# EAGLE board SparkFun_Qwiic_Presence_STHS34PF80-Panel (EAGLE 9.6.2), part 1 of 3
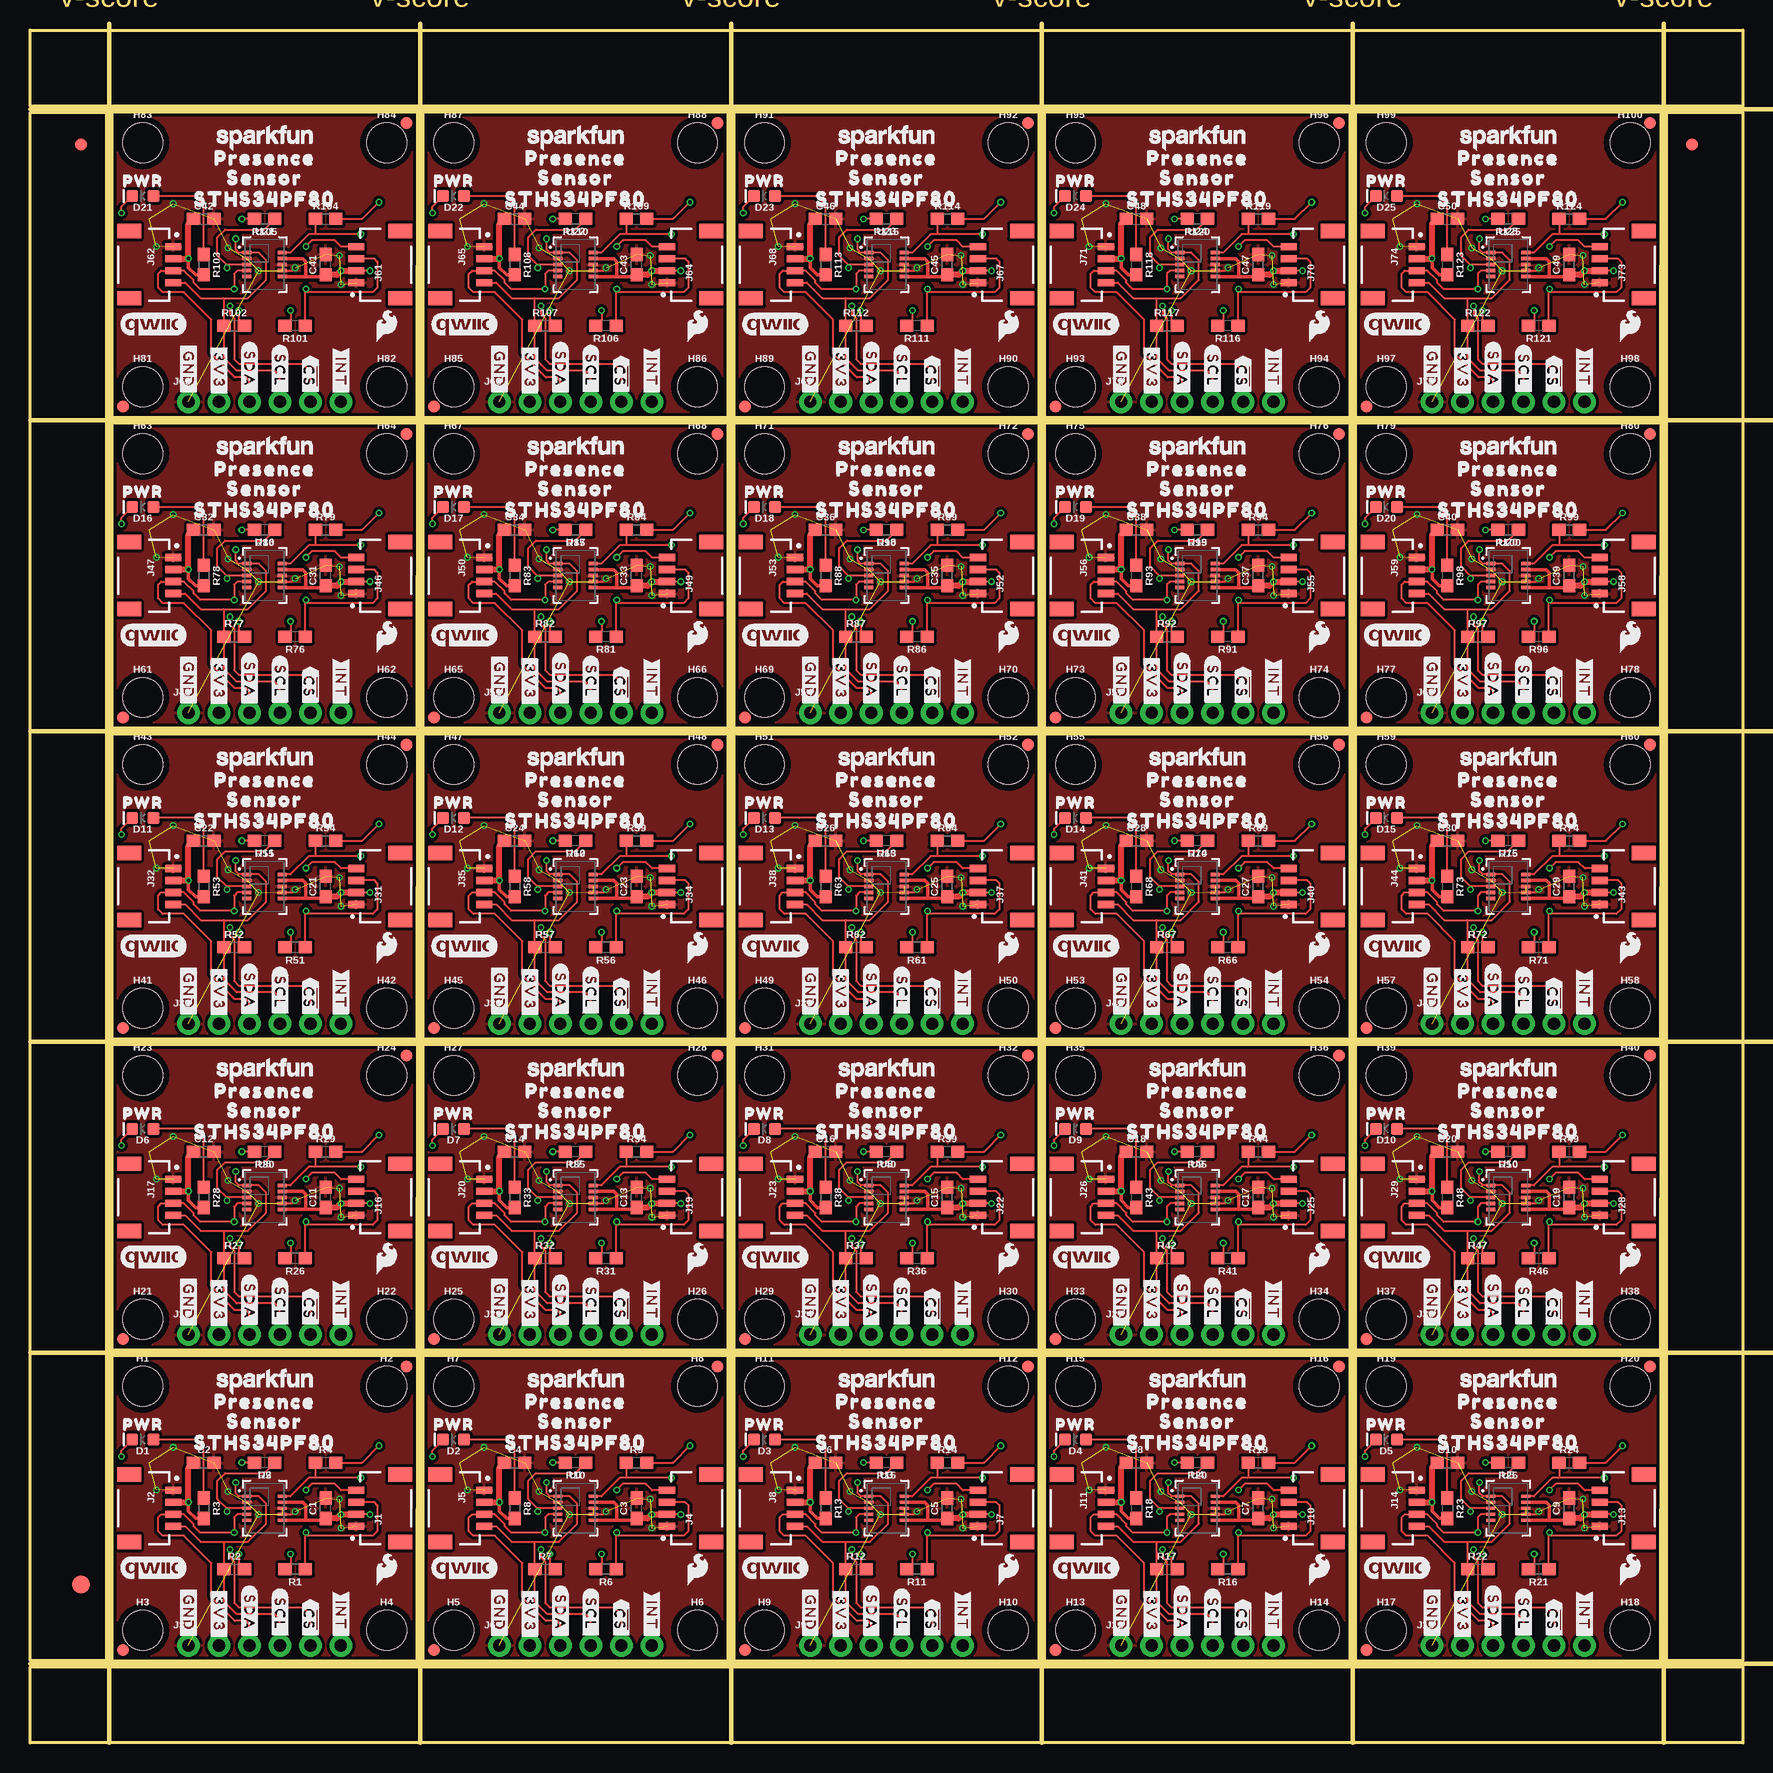
[diagram p0: board, top side]
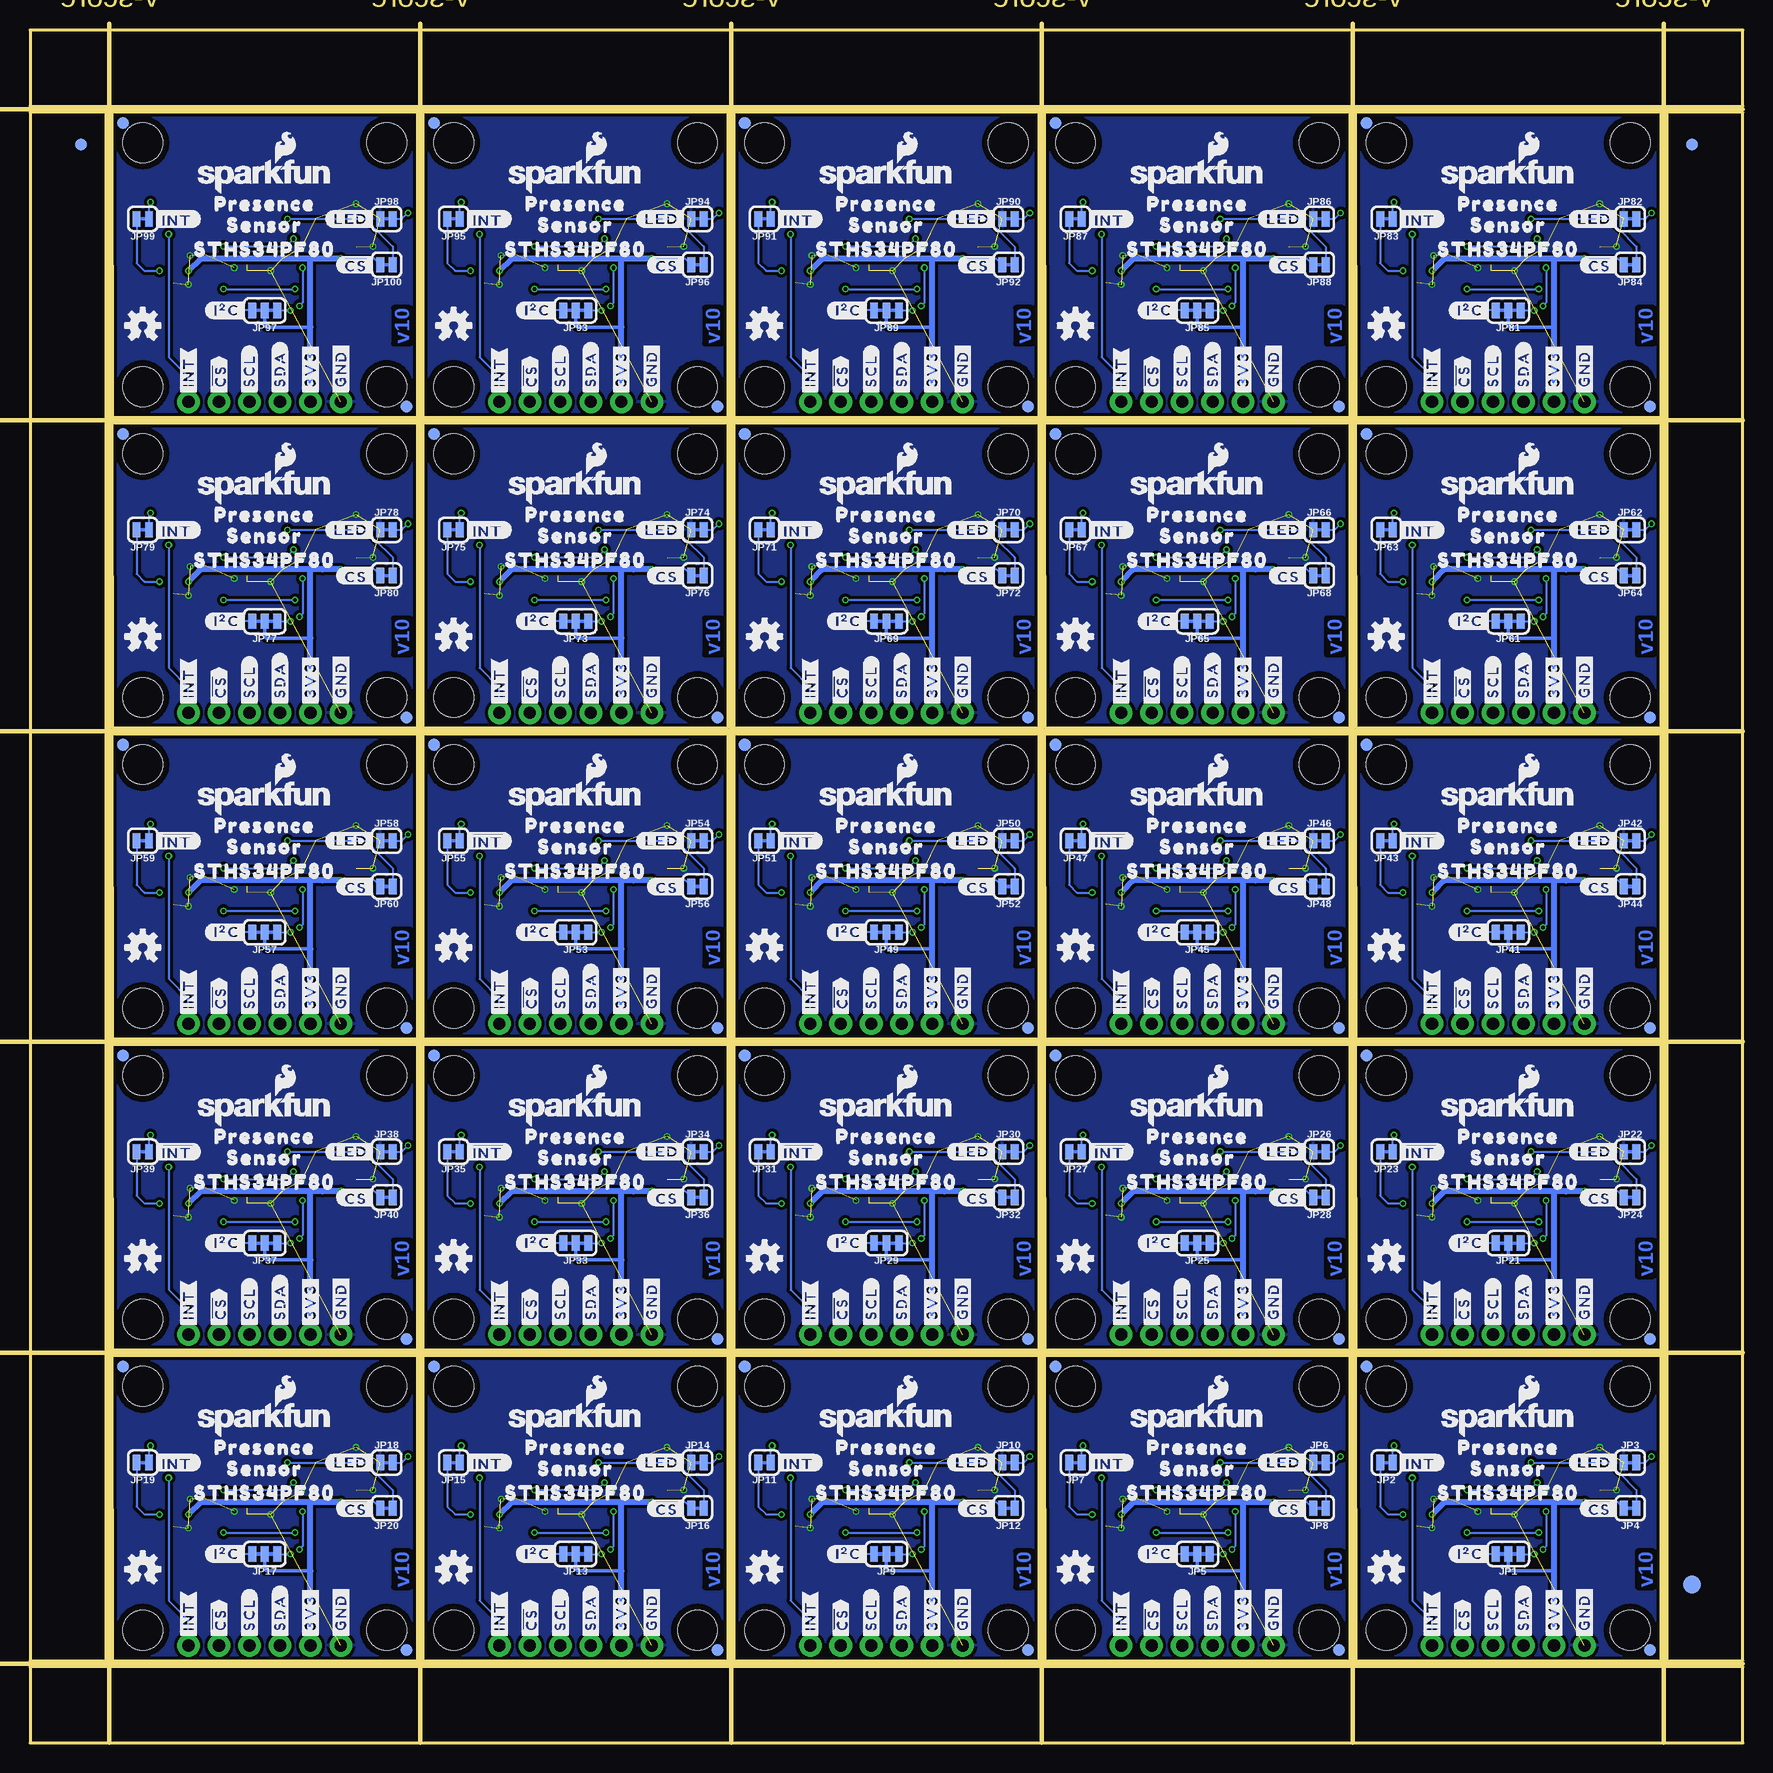
[diagram p1: board, bottom side, seen from below]

Size 142.75 x 142.75 mm. Coordinates in mm from the lower left corner, seen from the top.
Outline: 6.86,6.86 32.24,6.86 32.26,32.26 6.86,32.26 6.86,6.86
Outline: 32.77,6.86 58.15,6.86 58.17,32.26 32.77,32.26 32.77,6.86
Outline: 58.67,6.86 84.05,6.86 84.07,32.26 58.67,32.26 58.67,6.86
Outline: 84.58,6.86 109.96,6.86 109.98,32.26 84.58,32.26 84.58,6.86
Outline: 110.49,6.86 135.87,6.86 135.89,32.26 110.49,32.26 110.49,6.86
Outline: 6.86,32.77 32.24,32.77 32.26,58.17 6.86,58.17 6.86,32.77
Outline: 32.77,32.77 58.15,32.77 58.17,58.17 32.77,58.17 32.77,32.77
Outline: 58.67,32.77 84.05,32.77 84.07,58.17 58.67,58.17 58.67,32.77
Outline: 84.58,32.77 109.96,32.77 109.98,58.17 84.58,58.17 84.58,32.77
Outline: 110.49,32.77 135.87,32.77 135.89,58.17 110.49,58.17 110.49,32.77
Outline: 6.86,58.67 32.24,58.67 32.26,84.07 6.86,84.07 6.86,58.67
Outline: 32.77,58.67 58.15,58.67 58.17,84.07 32.77,84.07 32.77,58.67
Outline: 58.67,58.67 84.05,58.67 84.07,84.07 58.67,84.07 58.67,58.67
Outline: 84.58,58.67 109.96,58.67 109.98,84.07 84.58,84.07 84.58,58.67
Outline: 110.49,58.67 135.87,58.67 135.89,84.07 110.49,84.07 110.49,58.67
Outline: 6.86,84.58 32.24,84.58 32.26,109.98 6.86,109.98 6.86,84.58
Outline: 32.77,84.58 58.15,84.58 58.17,109.98 32.77,109.98 32.77,84.58
Outline: 58.67,84.58 84.05,84.58 84.07,109.98 58.67,109.98 58.67,84.58
Outline: 84.58,84.58 109.96,84.58 109.98,109.98 84.58,109.98 84.58,84.58
Outline: 110.49,84.58 135.87,84.58 135.89,109.98 110.49,109.98 110.49,84.58
Outline: 6.86,110.49 32.24,110.49 32.26,135.89 6.86,135.89 6.86,110.49
Outline: 32.77,110.49 58.15,110.49 58.17,135.89 32.77,135.89 32.77,110.49
Outline: 58.67,110.49 84.05,110.49 84.07,135.89 58.67,135.89 58.67,110.49
Outline: 84.58,110.49 109.96,110.49 109.98,135.89 84.58,135.89 84.58,110.49
Outline: 110.49,110.49 135.87,110.49 135.89,135.89 110.49,135.89 110.49,110.49
Outline: 0,6.35 142.75,6.35 142.75,0 0,0 0,6.35
Outline: 136.4,135.89 142.75,135.89 142.75,6.86 136.4,6.86 136.4,135.89
Outline: 0,142.75 142.75,142.75 142.75,136.4 0,136.4 0,142.75
Outline: 0,135.89 6.35,135.89 6.35,6.86 0,6.86 0,135.89
Copper layers (1*16): Top 0.035mm / dielectric 1.5mm / Bottom 0.035mm
Design rules "SparkFun_Qwiic_Presence_STHS34PF80": minimum track width 5mil, minimum drill 0.3mm, track to track 5mil, track to pad 5mil, pad to pad 5mil, via to via 5mil, smd to smd 5mil, copper to edge 7mil, drill to drill 7mil, minimum pad ring 5mil, minimum via ring 5mil, stop-mask expansion 2.5mil, vias tented up to drill 25mil, thermal gap 10mil
Milling: 12 lines

## Footprints (pad centres in the part's own frame; a part is rotated, then mirrored left to right if it is on the bottom)
0603 = smd 1.1 x 1: 1 -0.85,0; 2 0.85,0
LED-0603 = smd 1 x 1: A -0.877,0; C 0.877,0
FIDUCIAL-1X2 = smd 1 x 1: 1 0,0
FIDUCIAL-1.5X3 = smd 1.5 x 1.5: 1 0,0
STAND-OFF = hole 3.302: 0,0
JST04_1MM_RA = smd 0.6 x 1.35: 1 -1.5,0; 2 -0.5,0; 3 0.5,0; 4 1.5,0 | smd 1.2 x 2: NC1 2.8,-3.675; NC2 -2.8,-3.675
1X06_NO_SILK = drill 1.016 pad 1.88: 1 0,0; 2 2.54,0; 3 5.08,0; 4 7.62,0; 5 10.16,0; 6 12.7,0
SMT-JUMPER_3_2-NC_TRACE_SILK = smd 0.66 x 1.27: 1 -1.041,0; 2 0,0; 3 1.041,0
SMT-JUMPER_2_NC_TRACE_SILK = smd 0.66 x 1.27: 1 -0.521,0; 2 0.521,0
OLGA-10L = smd 0.75 x 0.285: 1 -1.475,1; 2 -1.475,0.5; 3 -1.475,0; 4 -1.475,-0.5; 5 -1.475,-1; 6 1.475,-1; 7 1.475,-0.5; 8 1.475,0; 9 1.475,0.5; 10 1.475,1

## Placement (x,y rotation side)
C1  1.0uF  [0603]  24.64,19.56 90 top
C2  0.1uF  [0603]  14.48,23.37 0 top
C3  1.0uF  [0603]  50.55,19.56 90 top
C4  0.1uF  [0603]  40.39,23.37 0 top
C5  1.0uF  [0603]  76.45,19.56 90 top
C6  0.1uF  [0603]  66.29,23.37 0 top
C7  1.0uF  [0603]  102.36,19.56 90 top
C8  0.1uF  [0603]  92.2,23.37 0 top
C9  1.0uF  [0603]  128.27,19.56 90 top
C10  0.1uF  [0603]  118.11,23.37 0 top
C11  1.0uF  [0603]  24.64,45.47 90 top
C12  0.1uF  [0603]  14.48,49.28 0 top
C13  1.0uF  [0603]  50.55,45.47 90 top
C14  0.1uF  [0603]  40.39,49.28 0 top
C15  1.0uF  [0603]  76.45,45.47 90 top
C16  0.1uF  [0603]  66.29,49.28 0 top
C17  1.0uF  [0603]  102.36,45.47 90 top
C18  0.1uF  [0603]  92.2,49.28 0 top
C19  1.0uF  [0603]  128.27,45.47 90 top
C20  0.1uF  [0603]  118.11,49.28 0 top
C21  1.0uF  [0603]  24.64,71.37 90 top
C22  0.1uF  [0603]  14.48,75.18 0 top
C23  1.0uF  [0603]  50.55,71.37 90 top
C24  0.1uF  [0603]  40.39,75.18 0 top
C25  1.0uF  [0603]  76.45,71.37 90 top
C26  0.1uF  [0603]  66.29,75.18 0 top
C27  1.0uF  [0603]  102.36,71.37 90 top
C28  0.1uF  [0603]  92.2,75.18 0 top
C29  1.0uF  [0603]  128.27,71.37 90 top
C30  0.1uF  [0603]  118.11,75.18 0 top
C31  1.0uF  [0603]  24.64,97.28 90 top
C32  0.1uF  [0603]  14.48,101.09 0 top
C33  1.0uF  [0603]  50.55,97.28 90 top
C34  0.1uF  [0603]  40.39,101.09 0 top
C35  1.0uF  [0603]  76.45,97.28 90 top
C36  0.1uF  [0603]  66.29,101.09 0 top
C37  1.0uF  [0603]  102.36,97.28 90 top
C38  0.1uF  [0603]  92.2,101.09 0 top
C39  1.0uF  [0603]  128.27,97.28 90 top
C40  0.1uF  [0603]  118.11,101.09 0 top
C41  1.0uF  [0603]  24.64,123.19 90 top
C42  0.1uF  [0603]  14.48,127 0 top
C43  1.0uF  [0603]  50.55,123.19 90 top
C44  0.1uF  [0603]  40.39,127 0 top
C45  1.0uF  [0603]  76.45,123.19 90 top
C46  0.1uF  [0603]  66.29,127 0 top
C47  1.0uF  [0603]  102.36,123.19 90 top
C48  0.1uF  [0603]  92.2,127 0 top
C49  1.0uF  [0603]  128.27,123.19 90 top
C50  0.1uF  [0603]  118.11,127 0 top
D1  RED  [LED-0603]  9.4,25.27 180 top
D2  RED  [LED-0603]  35.31,25.27 180 top
D3  RED  [LED-0603]  61.21,25.27 180 top
D4  RED  [LED-0603]  87.12,25.27 180 top
D5  RED  [LED-0603]  113.03,25.27 180 top
D6  RED  [LED-0603]  9.4,51.18 180 top
D7  RED  [LED-0603]  35.31,51.18 180 top
D8  RED  [LED-0603]  61.21,51.18 180 top
D9  RED  [LED-0603]  87.12,51.18 180 top
D10  RED  [LED-0603]  113.03,51.18 180 top
D11  RED  [LED-0603]  9.4,77.09 180 top
D12  RED  [LED-0603]  35.31,77.09 180 top
D13  RED  [LED-0603]  61.21,77.09 180 top
D14  RED  [LED-0603]  87.12,77.09 180 top
D15  RED  [LED-0603]  113.03,77.09 180 top
D16  RED  [LED-0603]  9.4,103 180 top
D17  RED  [LED-0603]  35.31,103 180 top
D18  RED  [LED-0603]  61.21,103 180 top
D19  RED  [LED-0603]  87.12,103 180 top
D20  RED  [LED-0603]  113.03,103 180 top
D21  RED  [LED-0603]  9.4,128.91 180 top
D22  RED  [LED-0603]  35.31,128.91 180 top
D23  RED  [LED-0603]  61.21,128.91 180 top
D24  RED  [LED-0603]  87.12,128.91 180 top
D25  RED  [LED-0603]  113.03,128.91 180 top
E$1  [FIDUCIAL-1X2]  4.23,133.22 0 top
E$2  [FIDUCIAL-1X2]  4.23,133.22 0 bottom
E$3  [FIDUCIAL-1X2]  138.51,133.22 0 top
E$4  [FIDUCIAL-1X2]  138.51,133.22 0 bottom
E$5  [FIDUCIAL-1.5X3]  4.23,13.21 0 top
E$6  [FIDUCIAL-1.5X3]  4.23,13.21 0 bottom
FD1  FIDUCIAL1X2  [FIDUCIAL-1X2]  7.75,7.75 0 bottom
FD2  FIDUCIAL1X2  [FIDUCIAL-1X2]  7.75,7.75 0 top
FD3  FIDUCIAL1X2  [FIDUCIAL-1X2]  31.37,31.37 0 bottom
FD4  FIDUCIAL1X2  [FIDUCIAL-1X2]  31.37,31.37 0 top
FD5  FIDUCIAL1X2  [FIDUCIAL-1X2]  33.66,7.75 0 bottom
FD6  FIDUCIAL1X2  [FIDUCIAL-1X2]  33.66,7.75 0 top
FD7  FIDUCIAL1X2  [FIDUCIAL-1X2]  57.28,31.37 0 bottom
FD8  FIDUCIAL1X2  [FIDUCIAL-1X2]  57.28,31.37 0 top
FD9  FIDUCIAL1X2  [FIDUCIAL-1X2]  59.56,7.75 0 bottom
FD10  FIDUCIAL1X2  [FIDUCIAL-1X2]  59.56,7.75 0 top
FD11  FIDUCIAL1X2  [FIDUCIAL-1X2]  83.19,31.37 0 bottom
FD12  FIDUCIAL1X2  [FIDUCIAL-1X2]  83.19,31.37 0 top
FD13  FIDUCIAL1X2  [FIDUCIAL-1X2]  85.47,7.75 0 bottom
FD14  FIDUCIAL1X2  [FIDUCIAL-1X2]  85.47,7.75 0 top
FD15  FIDUCIAL1X2  [FIDUCIAL-1X2]  109.09,31.37 0 bottom
FD16  FIDUCIAL1X2  [FIDUCIAL-1X2]  109.09,31.37 0 top
FD17  FIDUCIAL1X2  [FIDUCIAL-1X2]  111.38,7.75 0 bottom
FD18  FIDUCIAL1X2  [FIDUCIAL-1X2]  111.38,7.75 0 top
FD19  FIDUCIAL1X2  [FIDUCIAL-1X2]  135,31.37 0 bottom
FD20  FIDUCIAL1X2  [FIDUCIAL-1X2]  135,31.37 0 top
FD21  FIDUCIAL1X2  [FIDUCIAL-1X2]  7.75,33.66 0 bottom
FD22  FIDUCIAL1X2  [FIDUCIAL-1X2]  7.75,33.66 0 top
FD23  FIDUCIAL1X2  [FIDUCIAL-1X2]  31.37,57.28 0 bottom
FD24  FIDUCIAL1X2  [FIDUCIAL-1X2]  31.37,57.28 0 top
FD25  FIDUCIAL1X2  [FIDUCIAL-1X2]  33.66,33.66 0 bottom
FD26  FIDUCIAL1X2  [FIDUCIAL-1X2]  33.66,33.66 0 top
FD27  FIDUCIAL1X2  [FIDUCIAL-1X2]  57.28,57.28 0 bottom
FD28  FIDUCIAL1X2  [FIDUCIAL-1X2]  57.28,57.28 0 top
FD29  FIDUCIAL1X2  [FIDUCIAL-1X2]  59.56,33.66 0 bottom
FD30  FIDUCIAL1X2  [FIDUCIAL-1X2]  59.56,33.66 0 top
FD31  FIDUCIAL1X2  [FIDUCIAL-1X2]  83.19,57.28 0 bottom
FD32  FIDUCIAL1X2  [FIDUCIAL-1X2]  83.19,57.28 0 top
FD33  FIDUCIAL1X2  [FIDUCIAL-1X2]  85.47,33.66 0 bottom
FD34  FIDUCIAL1X2  [FIDUCIAL-1X2]  85.47,33.66 0 top
FD35  FIDUCIAL1X2  [FIDUCIAL-1X2]  109.09,57.28 0 bottom
FD36  FIDUCIAL1X2  [FIDUCIAL-1X2]  109.09,57.28 0 top
FD37  FIDUCIAL1X2  [FIDUCIAL-1X2]  111.38,33.66 0 bottom
FD38  FIDUCIAL1X2  [FIDUCIAL-1X2]  111.38,33.66 0 top
FD39  FIDUCIAL1X2  [FIDUCIAL-1X2]  135,57.28 0 bottom
FD40  FIDUCIAL1X2  [FIDUCIAL-1X2]  135,57.28 0 top
FD41  FIDUCIAL1X2  [FIDUCIAL-1X2]  7.75,59.56 0 bottom
FD42  FIDUCIAL1X2  [FIDUCIAL-1X2]  7.75,59.56 0 top
FD43  FIDUCIAL1X2  [FIDUCIAL-1X2]  31.37,83.19 0 bottom
FD44  FIDUCIAL1X2  [FIDUCIAL-1X2]  31.37,83.19 0 top
FD45  FIDUCIAL1X2  [FIDUCIAL-1X2]  33.66,59.56 0 bottom
FD46  FIDUCIAL1X2  [FIDUCIAL-1X2]  33.66,59.56 0 top
FD47  FIDUCIAL1X2  [FIDUCIAL-1X2]  57.28,83.19 0 bottom
FD48  FIDUCIAL1X2  [FIDUCIAL-1X2]  57.28,83.19 0 top
FD49  FIDUCIAL1X2  [FIDUCIAL-1X2]  59.56,59.56 0 bottom
FD50  FIDUCIAL1X2  [FIDUCIAL-1X2]  59.56,59.56 0 top
FD51  FIDUCIAL1X2  [FIDUCIAL-1X2]  83.19,83.19 0 bottom
FD52  FIDUCIAL1X2  [FIDUCIAL-1X2]  83.19,83.19 0 top
FD53  FIDUCIAL1X2  [FIDUCIAL-1X2]  85.47,59.56 0 bottom
FD54  FIDUCIAL1X2  [FIDUCIAL-1X2]  85.47,59.56 0 top
FD55  FIDUCIAL1X2  [FIDUCIAL-1X2]  109.09,83.19 0 bottom
FD56  FIDUCIAL1X2  [FIDUCIAL-1X2]  109.09,83.19 0 top
FD57  FIDUCIAL1X2  [FIDUCIAL-1X2]  111.38,59.56 0 bottom
FD58  FIDUCIAL1X2  [FIDUCIAL-1X2]  111.38,59.56 0 top
FD59  FIDUCIAL1X2  [FIDUCIAL-1X2]  135,83.19 0 bottom
FD60  FIDUCIAL1X2  [FIDUCIAL-1X2]  135,83.19 0 top
FD61  FIDUCIAL1X2  [FIDUCIAL-1X2]  7.75,85.47 0 bottom
FD62  FIDUCIAL1X2  [FIDUCIAL-1X2]  7.75,85.47 0 top
FD63  FIDUCIAL1X2  [FIDUCIAL-1X2]  31.37,109.09 0 bottom
FD64  FIDUCIAL1X2  [FIDUCIAL-1X2]  31.37,109.09 0 top
FD65  FIDUCIAL1X2  [FIDUCIAL-1X2]  33.66,85.47 0 bottom
FD66  FIDUCIAL1X2  [FIDUCIAL-1X2]  33.66,85.47 0 top
FD67  FIDUCIAL1X2  [FIDUCIAL-1X2]  57.28,109.09 0 bottom
FD68  FIDUCIAL1X2  [FIDUCIAL-1X2]  57.28,109.09 0 top
FD69  FIDUCIAL1X2  [FIDUCIAL-1X2]  59.56,85.47 0 bottom
FD70  FIDUCIAL1X2  [FIDUCIAL-1X2]  59.56,85.47 0 top
FD71  FIDUCIAL1X2  [FIDUCIAL-1X2]  83.19,109.09 0 bottom
FD72  FIDUCIAL1X2  [FIDUCIAL-1X2]  83.19,109.09 0 top
FD73  FIDUCIAL1X2  [FIDUCIAL-1X2]  85.47,85.47 0 bottom
FD74  FIDUCIAL1X2  [FIDUCIAL-1X2]  85.47,85.47 0 top
FD75  FIDUCIAL1X2  [FIDUCIAL-1X2]  109.09,109.09 0 bottom
FD76  FIDUCIAL1X2  [FIDUCIAL-1X2]  109.09,109.09 0 top
FD77  FIDUCIAL1X2  [FIDUCIAL-1X2]  111.38,85.47 0 bottom
FD78  FIDUCIAL1X2  [FIDUCIAL-1X2]  111.38,85.47 0 top
FD79  FIDUCIAL1X2  [FIDUCIAL-1X2]  135,109.09 0 bottom
FD80  FIDUCIAL1X2  [FIDUCIAL-1X2]  135,109.09 0 top
FD81  FIDUCIAL1X2  [FIDUCIAL-1X2]  7.75,111.38 0 bottom
FD82  FIDUCIAL1X2  [FIDUCIAL-1X2]  7.75,111.38 0 top
FD83  FIDUCIAL1X2  [FIDUCIAL-1X2]  31.37,135 0 bottom
FD84  FIDUCIAL1X2  [FIDUCIAL-1X2]  31.37,135 0 top
FD85  FIDUCIAL1X2  [FIDUCIAL-1X2]  33.66,111.38 0 bottom
FD86  FIDUCIAL1X2  [FIDUCIAL-1X2]  33.66,111.38 0 top
FD87  FIDUCIAL1X2  [FIDUCIAL-1X2]  57.28,135 0 bottom
FD88  FIDUCIAL1X2  [FIDUCIAL-1X2]  57.28,135 0 top
FD89  FIDUCIAL1X2  [FIDUCIAL-1X2]  59.56,111.38 0 bottom
FD90  FIDUCIAL1X2  [FIDUCIAL-1X2]  59.56,111.38 0 top
FD91  FIDUCIAL1X2  [FIDUCIAL-1X2]  83.19,135 0 bottom
FD92  FIDUCIAL1X2  [FIDUCIAL-1X2]  83.19,135 0 top
FD93  FIDUCIAL1X2  [FIDUCIAL-1X2]  85.47,111.38 0 bottom
FD94  FIDUCIAL1X2  [FIDUCIAL-1X2]  85.47,111.38 0 top
FD95  FIDUCIAL1X2  [FIDUCIAL-1X2]  109.09,135 0 bottom
FD96  FIDUCIAL1X2  [FIDUCIAL-1X2]  109.09,135 0 top
FD97  FIDUCIAL1X2  [FIDUCIAL-1X2]  111.38,111.38 0 bottom
FD98  FIDUCIAL1X2  [FIDUCIAL-1X2]  111.38,111.38 0 top
FD99  FIDUCIAL1X2  [FIDUCIAL-1X2]  135,135 0 bottom
FD100  FIDUCIAL1X2  [FIDUCIAL-1X2]  135,135 0 top
H1  STAND-OFF  [STAND-OFF]  9.4,29.72 0 top
H2  STAND-OFF  [STAND-OFF]  29.72,29.72 0 top
H3  STAND-OFF  [STAND-OFF]  9.4,9.4 0 top
H4  STAND-OFF  [STAND-OFF]  29.72,9.4 0 top
H5  STAND-OFF  [STAND-OFF]  35.31,9.4 0 top
H6  STAND-OFF  [STAND-OFF]  55.63,9.4 0 top
H7  STAND-OFF  [STAND-OFF]  35.31,29.72 0 top
H8  STAND-OFF  [STAND-OFF]  55.63,29.72 0 top
H9  STAND-OFF  [STAND-OFF]  61.21,9.4 0 top
H10  STAND-OFF  [STAND-OFF]  81.53,9.4 0 top
H11  STAND-OFF  [STAND-OFF]  61.21,29.72 0 top
H12  STAND-OFF  [STAND-OFF]  81.53,29.72 0 top
H13  STAND-OFF  [STAND-OFF]  87.12,9.4 0 top
H14  STAND-OFF  [STAND-OFF]  107.44,9.4 0 top
H15  STAND-OFF  [STAND-OFF]  87.12,29.72 0 top
H16  STAND-OFF  [STAND-OFF]  107.44,29.72 0 top
H17  STAND-OFF  [STAND-OFF]  113.03,9.4 0 top
H18  STAND-OFF  [STAND-OFF]  133.35,9.4 0 top
H19  STAND-OFF  [STAND-OFF]  113.03,29.72 0 top
H20  STAND-OFF  [STAND-OFF]  133.35,29.72 0 top
H21  STAND-OFF  [STAND-OFF]  9.4,35.31 0 top
H22  STAND-OFF  [STAND-OFF]  29.72,35.31 0 top
H23  STAND-OFF  [STAND-OFF]  9.4,55.63 0 top
H24  STAND-OFF  [STAND-OFF]  29.72,55.63 0 top
H25  STAND-OFF  [STAND-OFF]  35.31,35.31 0 top
H26  STAND-OFF  [STAND-OFF]  55.63,35.31 0 top
H27  STAND-OFF  [STAND-OFF]  35.31,55.63 0 top
H28  STAND-OFF  [STAND-OFF]  55.63,55.63 0 top
H29  STAND-OFF  [STAND-OFF]  61.21,35.31 0 top
H30  STAND-OFF  [STAND-OFF]  81.53,35.31 0 top
H31  STAND-OFF  [STAND-OFF]  61.21,55.63 0 top
H32  STAND-OFF  [STAND-OFF]  81.53,55.63 0 top
H33  STAND-OFF  [STAND-OFF]  87.12,35.31 0 top
H34  STAND-OFF  [STAND-OFF]  107.44,35.31 0 top
H35  STAND-OFF  [STAND-OFF]  87.12,55.63 0 top
H36  STAND-OFF  [STAND-OFF]  107.44,55.63 0 top
H37  STAND-OFF  [STAND-OFF]  113.03,35.31 0 top
H38  STAND-OFF  [STAND-OFF]  133.35,35.31 0 top
H39  STAND-OFF  [STAND-OFF]  113.03,55.63 0 top
H40  STAND-OFF  [STAND-OFF]  133.35,55.63 0 top
H41  STAND-OFF  [STAND-OFF]  9.4,61.21 0 top
H42  STAND-OFF  [STAND-OFF]  29.72,61.21 0 top
H43  STAND-OFF  [STAND-OFF]  9.4,81.53 0 top
H44  STAND-OFF  [STAND-OFF]  29.72,81.53 0 top
H45  STAND-OFF  [STAND-OFF]  35.31,61.21 0 top
H46  STAND-OFF  [STAND-OFF]  55.63,61.21 0 top
H47  STAND-OFF  [STAND-OFF]  35.31,81.53 0 top
H48  STAND-OFF  [STAND-OFF]  55.63,81.53 0 top
H49  STAND-OFF  [STAND-OFF]  61.21,61.21 0 top
H50  STAND-OFF  [STAND-OFF]  81.53,61.21 0 top
H51  STAND-OFF  [STAND-OFF]  61.21,81.53 0 top
H52  STAND-OFF  [STAND-OFF]  81.53,81.53 0 top
H53  STAND-OFF  [STAND-OFF]  87.12,61.21 0 top
H54  STAND-OFF  [STAND-OFF]  107.44,61.21 0 top
H55  STAND-OFF  [STAND-OFF]  87.12,81.53 0 top
H56  STAND-OFF  [STAND-OFF]  107.44,81.53 0 top
H57  STAND-OFF  [STAND-OFF]  113.03,61.21 0 top
H58  STAND-OFF  [STAND-OFF]  133.35,61.21 0 top
H59  STAND-OFF  [STAND-OFF]  113.03,81.53 0 top
H60  STAND-OFF  [STAND-OFF]  133.35,81.53 0 top
H61  STAND-OFF  [STAND-OFF]  9.4,87.12 0 top
H62  STAND-OFF  [STAND-OFF]  29.72,87.12 0 top
H63  STAND-OFF  [STAND-OFF]  9.4,107.44 0 top
H64  STAND-OFF  [STAND-OFF]  29.72,107.44 0 top
H65  STAND-OFF  [STAND-OFF]  35.31,87.12 0 top
H66  STAND-OFF  [STAND-OFF]  55.63,87.12 0 top
H67  STAND-OFF  [STAND-OFF]  35.31,107.44 0 top
H68  STAND-OFF  [STAND-OFF]  55.63,107.44 0 top
H69  STAND-OFF  [STAND-OFF]  61.21,87.12 0 top
H70  STAND-OFF  [STAND-OFF]  81.53,87.12 0 top
H71  STAND-OFF  [STAND-OFF]  61.21,107.44 0 top
H72  STAND-OFF  [STAND-OFF]  81.53,107.44 0 top
H73  STAND-OFF  [STAND-OFF]  87.12,87.12 0 top
H74  STAND-OFF  [STAND-OFF]  107.44,87.12 0 top
H75  STAND-OFF  [STAND-OFF]  87.12,107.44 0 top
H76  STAND-OFF  [STAND-OFF]  107.44,107.44 0 top
H77  STAND-OFF  [STAND-OFF]  113.03,87.12 0 top
H78  STAND-OFF  [STAND-OFF]  133.35,87.12 0 top
H79  STAND-OFF  [STAND-OFF]  113.03,107.44 0 top
H80  STAND-OFF  [STAND-OFF]  133.35,107.44 0 top
H81  STAND-OFF  [STAND-OFF]  9.4,113.03 0 top
H82  STAND-OFF  [STAND-OFF]  29.72,113.03 0 top
H83  STAND-OFF  [STAND-OFF]  9.4,133.35 0 top
H84  STAND-OFF  [STAND-OFF]  29.72,133.35 0 top
H85  STAND-OFF  [STAND-OFF]  35.31,113.03 0 top
H86  STAND-OFF  [STAND-OFF]  55.63,113.03 0 top
H87  STAND-OFF  [STAND-OFF]  35.31,133.35 0 top
H88  STAND-OFF  [STAND-OFF]  55.63,133.35 0 top
H89  STAND-OFF  [STAND-OFF]  61.21,113.03 0 top
H90  STAND-OFF  [STAND-OFF]  81.53,113.03 0 top
H91  STAND-OFF  [STAND-OFF]  61.21,133.35 0 top
H92  STAND-OFF  [STAND-OFF]  81.53,133.35 0 top
H93  STAND-OFF  [STAND-OFF]  87.12,113.03 0 top
H94  STAND-OFF  [STAND-OFF]  107.44,113.03 0 top
H95  STAND-OFF  [STAND-OFF]  87.12,133.35 0 top
H96  STAND-OFF  [STAND-OFF]  107.44,133.35 0 top
H97  STAND-OFF  [STAND-OFF]  113.03,113.03 0 top
H98  STAND-OFF  [STAND-OFF]  133.35,113.03 0 top
H99  STAND-OFF  [STAND-OFF]  113.03,133.35 0 top
H100  STAND-OFF  [STAND-OFF]  133.35,133.35 0 top
J1  Qwiic  [JST04_1MM_RA]  27.18,19.56 90 top
J2  Qwiic  [JST04_1MM_RA]  11.94,19.56 270 top
J3  [1X06_NO_SILK]  13.21,8.13 0 top
J4  Qwiic  [JST04_1MM_RA]  53.09,19.56 90 top
J5  Qwiic  [JST04_1MM_RA]  37.85,19.56 270 top
J6  [1X06_NO_SILK]  39.12,8.13 0 top
J7  Qwiic  [JST04_1MM_RA]  78.99,19.56 90 top
J8  Qwiic  [JST04_1MM_RA]  63.75,19.56 270 top
J9  [1X06_NO_SILK]  65.02,8.13 0 top
J10  Qwiic  [JST04_1MM_RA]  104.9,19.56 90 top
J11  Qwiic  [JST04_1MM_RA]  89.66,19.56 270 top
J12  [1X06_NO_SILK]  90.93,8.13 0 top
J13  Qwiic  [JST04_1MM_RA]  130.81,19.56 90 top
J14  Qwiic  [JST04_1MM_RA]  115.57,19.56 270 top
J15  [1X06_NO_SILK]  116.84,8.13 0 top
J16  Qwiic  [JST04_1MM_RA]  27.18,45.47 90 top
J17  Qwiic  [JST04_1MM_RA]  11.94,45.47 270 top
J18  [1X06_NO_SILK]  13.21,34.04 0 top
J19  Qwiic  [JST04_1MM_RA]  53.09,45.47 90 top
J20  Qwiic  [JST04_1MM_RA]  37.85,45.47 270 top
J21  [1X06_NO_SILK]  39.12,34.04 0 top
J22  Qwiic  [JST04_1MM_RA]  78.99,45.47 90 top
J23  Qwiic  [JST04_1MM_RA]  63.75,45.47 270 top
J24  [1X06_NO_SILK]  65.02,34.04 0 top
J25  Qwiic  [JST04_1MM_RA]  104.9,45.47 90 top
J26  Qwiic  [JST04_1MM_RA]  89.66,45.47 270 top
J27  [1X06_NO_SILK]  90.93,34.04 0 top
J28  Qwiic  [JST04_1MM_RA]  130.81,45.47 90 top
J29  Qwiic  [JST04_1MM_RA]  115.57,45.47 270 top
J30  [1X06_NO_SILK]  116.84,34.04 0 top
J31  Qwiic  [JST04_1MM_RA]  27.18,71.37 90 top
J32  Qwiic  [JST04_1MM_RA]  11.94,71.37 270 top
J33  [1X06_NO_SILK]  13.21,59.94 0 top
J34  Qwiic  [JST04_1MM_RA]  53.09,71.37 90 top
J35  Qwiic  [JST04_1MM_RA]  37.85,71.37 270 top
J36  [1X06_NO_SILK]  39.12,59.94 0 top
J37  Qwiic  [JST04_1MM_RA]  78.99,71.37 90 top
J38  Qwiic  [JST04_1MM_RA]  63.75,71.37 270 top
J39  [1X06_NO_SILK]  65.02,59.94 0 top
J40  Qwiic  [JST04_1MM_RA]  104.9,71.37 90 top
J41  Qwiic  [JST04_1MM_RA]  89.66,71.37 270 top
J42  [1X06_NO_SILK]  90.93,59.94 0 top
J43  Qwiic  [JST04_1MM_RA]  130.81,71.37 90 top
J44  Qwiic  [JST04_1MM_RA]  115.57,71.37 270 top
J45  [1X06_NO_SILK]  116.84,59.94 0 top
J46  Qwiic  [JST04_1MM_RA]  27.18,97.28 90 top
J47  Qwiic  [JST04_1MM_RA]  11.94,97.28 270 top
J48  [1X06_NO_SILK]  13.21,85.85 0 top
J49  Qwiic  [JST04_1MM_RA]  53.09,97.28 90 top
J50  Qwiic  [JST04_1MM_RA]  37.85,97.28 270 top
J51  [1X06_NO_SILK]  39.12,85.85 0 top
J52  Qwiic  [JST04_1MM_RA]  78.99,97.28 90 top
J53  Qwiic  [JST04_1MM_RA]  63.75,97.28 270 top
J54  [1X06_NO_SILK]  65.02,85.85 0 top
J55  Qwiic  [JST04_1MM_RA]  104.9,97.28 90 top
J56  Qwiic  [JST04_1MM_RA]  89.66,97.28 270 top
J57  [1X06_NO_SILK]  90.93,85.85 0 top
J58  Qwiic  [JST04_1MM_RA]  130.81,97.28 90 top
J59  Qwiic  [JST04_1MM_RA]  115.57,97.28 270 top
J60  [1X06_NO_SILK]  116.84,85.85 0 top
J61  Qwiic  [JST04_1MM_RA]  27.18,123.19 90 top
J62  Qwiic  [JST04_1MM_RA]  11.94,123.19 270 top
J63  [1X06_NO_SILK]  13.21,111.76 0 top
J64  Qwiic  [JST04_1MM_RA]  53.09,123.19 90 top
J65  Qwiic  [JST04_1MM_RA]  37.85,123.19 270 top
J66  [1X06_NO_SILK]  39.12,111.76 0 top
J67  Qwiic  [JST04_1MM_RA]  78.99,123.19 90 top
J68  Qwiic  [JST04_1MM_RA]  63.75,123.19 270 top
J69  [1X06_NO_SILK]  65.02,111.76 0 top
J70  Qwiic  [JST04_1MM_RA]  104.9,123.19 90 top
J71  Qwiic  [JST04_1MM_RA]  89.66,123.19 270 top
J72  [1X06_NO_SILK]  90.93,111.76 0 top
J73  Qwiic  [JST04_1MM_RA]  130.81,123.19 90 top
J74  Qwiic  [JST04_1MM_RA]  115.57,123.19 270 top
J75  [1X06_NO_SILK]  116.84,111.76 0 top
JP1  JUMPER-SMT_3_2-NC_TRACE_SILK  [SMT-JUMPER_3_2-NC_TRACE_SILK]  19.56,15.75 180 bottom
JP2  JUMPER-SMT_2_NC_TRACE_SILK  [SMT-JUMPER_2_NC_TRACE_SILK]  29.72,23.37 180 bottom
JP3  JUMPER-SMT_2_NC_TRACE_SILK  [SMT-JUMPER_2_NC_TRACE_SILK]  9.4,23.37 0 bottom
JP4  JUMPER-SMT_2_NC_TRACE_SILK  [SMT-JUMPER_2_NC_TRACE_SILK]  9.4,19.56 180 bottom
JP5  JUMPER-SMT_3_2-NC_TRACE_SILK  [SMT-JUMPER_3_2-NC_TRACE_SILK]  45.47,15.75 180 bottom
JP6  JUMPER-SMT_2_NC_TRACE_SILK  [SMT-JUMPER_2_NC_TRACE_SILK]  35.31,23.37 0 bottom
JP7  JUMPER-SMT_2_NC_TRACE_SILK  [SMT-JUMPER_2_NC_TRACE_SILK]  55.63,23.37 180 bottom
JP8  JUMPER-SMT_2_NC_TRACE_SILK  [SMT-JUMPER_2_NC_TRACE_SILK]  35.31,19.56 180 bottom
JP9  JUMPER-SMT_3_2-NC_TRACE_SILK  [SMT-JUMPER_3_2-NC_TRACE_SILK]  71.37,15.75 180 bottom
JP10  JUMPER-SMT_2_NC_TRACE_SILK  [SMT-JUMPER_2_NC_TRACE_SILK]  61.21,23.37 0 bottom
JP11  JUMPER-SMT_2_NC_TRACE_SILK  [SMT-JUMPER_2_NC_TRACE_SILK]  81.53,23.37 180 bottom
JP12  JUMPER-SMT_2_NC_TRACE_SILK  [SMT-JUMPER_2_NC_TRACE_SILK]  61.21,19.56 180 bottom
JP13  JUMPER-SMT_3_2-NC_TRACE_SILK  [SMT-JUMPER_3_2-NC_TRACE_SILK]  97.28,15.75 180 bottom
JP14  JUMPER-SMT_2_NC_TRACE_SILK  [SMT-JUMPER_2_NC_TRACE_SILK]  87.12,23.37 0 bottom
JP15  JUMPER-SMT_2_NC_TRACE_SILK  [SMT-JUMPER_2_NC_TRACE_SILK]  107.44,23.37 180 bottom
JP16  JUMPER-SMT_2_NC_TRACE_SILK  [SMT-JUMPER_2_NC_TRACE_SILK]  87.12,19.56 180 bottom
JP17  JUMPER-SMT_3_2-NC_TRACE_SILK  [SMT-JUMPER_3_2-NC_TRACE_SILK]  123.19,15.75 180 bottom
JP18  JUMPER-SMT_2_NC_TRACE_SILK  [SMT-JUMPER_2_NC_TRACE_SILK]  113.03,23.37 0 bottom
JP19  JUMPER-SMT_2_NC_TRACE_SILK  [SMT-JUMPER_2_NC_TRACE_SILK]  133.35,23.37 180 bottom
JP20  JUMPER-SMT_2_NC_TRACE_SILK  [SMT-JUMPER_2_NC_TRACE_SILK]  113.03,19.56 180 bottom
JP21  JUMPER-SMT_3_2-NC_TRACE_SILK  [SMT-JUMPER_3_2-NC_TRACE_SILK]  19.56,41.66 180 bottom
JP22  JUMPER-SMT_2_NC_TRACE_SILK  [SMT-JUMPER_2_NC_TRACE_SILK]  9.4,49.28 0 bottom
JP23  JUMPER-SMT_2_NC_TRACE_SILK  [SMT-JUMPER_2_NC_TRACE_SILK]  29.72,49.28 180 bottom
JP24  JUMPER-SMT_2_NC_TRACE_SILK  [SMT-JUMPER_2_NC_TRACE_SILK]  9.4,45.47 180 bottom
JP25  JUMPER-SMT_3_2-NC_TRACE_SILK  [SMT-JUMPER_3_2-NC_TRACE_SILK]  45.47,41.66 180 bottom
JP26  JUMPER-SMT_2_NC_TRACE_SILK  [SMT-JUMPER_2_NC_TRACE_SILK]  35.31,49.28 0 bottom
JP27  JUMPER-SMT_2_NC_TRACE_SILK  [SMT-JUMPER_2_NC_TRACE_SILK]  55.63,49.28 180 bottom
JP28  JUMPER-SMT_2_NC_TRACE_SILK  [SMT-JUMPER_2_NC_TRACE_SILK]  35.31,45.47 180 bottom
JP29  JUMPER-SMT_3_2-NC_TRACE_SILK  [SMT-JUMPER_3_2-NC_TRACE_SILK]  71.37,41.66 180 bottom
JP30  JUMPER-SMT_2_NC_TRACE_SILK  [SMT-JUMPER_2_NC_TRACE_SILK]  61.21,49.28 0 bottom
JP31  JUMPER-SMT_2_NC_TRACE_SILK  [SMT-JUMPER_2_NC_TRACE_SILK]  81.53,49.28 180 bottom
JP32  JUMPER-SMT_2_NC_TRACE_SILK  [SMT-JUMPER_2_NC_TRACE_SILK]  61.21,45.47 180 bottom
JP33  JUMPER-SMT_3_2-NC_TRACE_SILK  [SMT-JUMPER_3_2-NC_TRACE_SILK]  97.28,41.66 180 bottom
JP34  JUMPER-SMT_2_NC_TRACE_SILK  [SMT-JUMPER_2_NC_TRACE_SILK]  87.12,49.28 0 bottom
JP35  JUMPER-SMT_2_NC_TRACE_SILK  [SMT-JUMPER_2_NC_TRACE_SILK]  107.44,49.28 180 bottom
JP36  JUMPER-SMT_2_NC_TRACE_SILK  [SMT-JUMPER_2_NC_TRACE_SILK]  87.12,45.47 180 bottom
JP37  JUMPER-SMT_3_2-NC_TRACE_SILK  [SMT-JUMPER_3_2-NC_TRACE_SILK]  123.19,41.66 180 bottom
JP38  JUMPER-SMT_2_NC_TRACE_SILK  [SMT-JUMPER_2_NC_TRACE_SILK]  113.03,49.28 0 bottom
JP39  JUMPER-SMT_2_NC_TRACE_SILK  [SMT-JUMPER_2_NC_TRACE_SILK]  133.35,49.28 180 bottom
JP40  JUMPER-SMT_2_NC_TRACE_SILK  [SMT-JUMPER_2_NC_TRACE_SILK]  113.03,45.47 180 bottom
JP41  JUMPER-SMT_3_2-NC_TRACE_SILK  [SMT-JUMPER_3_2-NC_TRACE_SILK]  19.56,67.56 180 bottom
JP42  JUMPER-SMT_2_NC_TRACE_SILK  [SMT-JUMPER_2_NC_TRACE_SILK]  9.4,75.18 0 bottom
JP43  JUMPER-SMT_2_NC_TRACE_SILK  [SMT-JUMPER_2_NC_TRACE_SILK]  29.72,75.18 180 bottom
JP44  JUMPER-SMT_2_NC_TRACE_SILK  [SMT-JUMPER_2_NC_TRACE_SILK]  9.4,71.37 180 bottom
JP45  JUMPER-SMT_3_2-NC_TRACE_SILK  [SMT-JUMPER_3_2-NC_TRACE_SILK]  45.47,67.56 180 bottom
JP46  JUMPER-SMT_2_NC_TRACE_SILK  [SMT-JUMPER_2_NC_TRACE_SILK]  35.31,75.18 0 bottom
JP47  JUMPER-SMT_2_NC_TRACE_SILK  [SMT-JUMPER_2_NC_TRACE_SILK]  55.63,75.18 180 bottom
JP48  JUMPER-SMT_2_NC_TRACE_SILK  [SMT-JUMPER_2_NC_TRACE_SILK]  35.31,71.37 180 bottom
JP49  JUMPER-SMT_3_2-NC_TRACE_SILK  [SMT-JUMPER_3_2-NC_TRACE_SILK]  71.37,67.56 180 bottom
JP50  JUMPER-SMT_2_NC_TRACE_SILK  [SMT-JUMPER_2_NC_TRACE_SILK]  61.21,75.18 0 bottom
JP51  JUMPER-SMT_2_NC_TRACE_SILK  [SMT-JUMPER_2_NC_TRACE_SILK]  81.53,75.18 180 bottom
JP52  JUMPER-SMT_2_NC_TRACE_SILK  [SMT-JUMPER_2_NC_TRACE_SILK]  61.21,71.37 180 bottom
JP53  JUMPER-SMT_3_2-NC_TRACE_SILK  [SMT-JUMPER_3_2-NC_TRACE_SILK]  97.28,67.56 180 bottom
JP54  JUMPER-SMT_2_NC_TRACE_SILK  [SMT-JUMPER_2_NC_TRACE_SILK]  87.12,75.18 0 bottom
JP55  JUMPER-SMT_2_NC_TRACE_SILK  [SMT-JUMPER_2_NC_TRACE_SILK]  107.44,75.18 180 bottom
JP56  JUMPER-SMT_2_NC_TRACE_SILK  [SMT-JUMPER_2_NC_TRACE_SILK]  87.12,71.37 180 bottom
JP57  JUMPER-SMT_3_2-NC_TRACE_SILK  [SMT-JUMPER_3_2-NC_TRACE_SILK]  123.19,67.56 180 bottom
JP58  JUMPER-SMT_2_NC_TRACE_SILK  [SMT-JUMPER_2_NC_TRACE_SILK]  113.03,75.18 0 bottom
JP59  JUMPER-SMT_2_NC_TRACE_SILK  [SMT-JUMPER_2_NC_TRACE_SILK]  133.35,75.18 180 bottom
JP60  JUMPER-SMT_2_NC_TRACE_SILK  [SMT-JUMPER_2_NC_TRACE_SILK]  113.03,71.37 180 bottom
JP61  JUMPER-SMT_3_2-NC_TRACE_SILK  [SMT-JUMPER_3_2-NC_TRACE_SILK]  19.56,93.47 180 bottom
JP62  JUMPER-SMT_2_NC_TRACE_SILK  [SMT-JUMPER_2_NC_TRACE_SILK]  9.4,101.09 0 bottom
JP63  JUMPER-SMT_2_NC_TRACE_SILK  [SMT-JUMPER_2_NC_TRACE_SILK]  29.72,101.09 180 bottom
JP64  JUMPER-SMT_2_NC_TRACE_SILK  [SMT-JUMPER_2_NC_TRACE_SILK]  9.4,97.28 180 bottom
JP65  JUMPER-SMT_3_2-NC_TRACE_SILK  [SMT-JUMPER_3_2-NC_TRACE_SILK]  45.47,93.47 180 bottom
JP66  JUMPER-SMT_2_NC_TRACE_SILK  [SMT-JUMPER_2_NC_TRACE_SILK]  35.31,101.09 0 bottom
JP67  JUMPER-SMT_2_NC_TRACE_SILK  [SMT-JUMPER_2_NC_TRACE_SILK]  55.63,101.09 180 bottom
JP68  JUMPER-SMT_2_NC_TRACE_SILK  [SMT-JUMPER_2_NC_TRACE_SILK]  35.31,97.28 180 bottom
JP69  JUMPER-SMT_3_2-NC_TRACE_SILK  [SMT-JUMPER_3_2-NC_TRACE_SILK]  71.37,93.47 180 bottom
JP70  JUMPER-SMT_2_NC_TRACE_SILK  [SMT-JUMPER_2_NC_TRACE_SILK]  61.21,101.09 0 bottom
JP71  JUMPER-SMT_2_NC_TRACE_SILK  [SMT-JUMPER_2_NC_TRACE_SILK]  81.53,101.09 180 bottom
JP72  JUMPER-SMT_2_NC_TRACE_SILK  [SMT-JUMPER_2_NC_TRACE_SILK]  61.21,97.28 180 bottom
JP73  JUMPER-SMT_3_2-NC_TRACE_SILK  [SMT-JUMPER_3_2-NC_TRACE_SILK]  97.28,93.47 180 bottom
JP74  JUMPER-SMT_2_NC_TRACE_SILK  [SMT-JUMPER_2_NC_TRACE_SILK]  87.12,101.09 0 bottom
JP75  JUMPER-SMT_2_NC_TRACE_SILK  [SMT-JUMPER_2_NC_TRACE_SILK]  107.44,101.09 180 bottom
JP76  JUMPER-SMT_2_NC_TRACE_SILK  [SMT-JUMPER_2_NC_TRACE_SILK]  87.12,97.28 180 bottom
JP77  JUMPER-SMT_3_2-NC_TRACE_SILK  [SMT-JUMPER_3_2-NC_TRACE_SILK]  123.19,93.47 180 bottom
JP78  JUMPER-SMT_2_NC_TRACE_SILK  [SMT-JUMPER_2_NC_TRACE_SILK]  113.03,101.09 0 bottom
JP79  JUMPER-SMT_2_NC_TRACE_SILK  [SMT-JUMPER_2_NC_TRACE_SILK]  133.35,101.09 180 bottom
JP80  JUMPER-SMT_2_NC_TRACE_SILK  [SMT-JUMPER_2_NC_TRACE_SILK]  113.03,97.28 180 bottom
JP81  JUMPER-SMT_3_2-NC_TRACE_SILK  [SMT-JUMPER_3_2-NC_TRACE_SILK]  19.56,119.38 180 bottom
JP82  JUMPER-SMT_2_NC_TRACE_SILK  [SMT-JUMPER_2_NC_TRACE_SILK]  9.4,127 0 bottom
JP83  JUMPER-SMT_2_NC_TRACE_SILK  [SMT-JUMPER_2_NC_TRACE_SILK]  29.72,127 180 bottom
JP84  JUMPER-SMT_2_NC_TRACE_SILK  [SMT-JUMPER_2_NC_TRACE_SILK]  9.4,123.19 180 bottom
JP85  JUMPER-SMT_3_2-NC_TRACE_SILK  [SMT-JUMPER_3_2-NC_TRACE_SILK]  45.47,119.38 180 bottom
JP86  JUMPER-SMT_2_NC_TRACE_SILK  [SMT-JUMPER_2_NC_TRACE_SILK]  35.31,127 0 bottom
JP87  JUMPER-SMT_2_NC_TRACE_SILK  [SMT-JUMPER_2_NC_TRACE_SILK]  55.63,127 180 bottom
JP88  JUMPER-SMT_2_NC_TRACE_SILK  [SMT-JUMPER_2_NC_TRACE_SILK]  35.31,123.19 180 bottom
JP89  JUMPER-SMT_3_2-NC_TRACE_SILK  [SMT-JUMPER_3_2-NC_TRACE_SILK]  71.37,119.38 180 bottom
JP90  JUMPER-SMT_2_NC_TRACE_SILK  [SMT-JUMPER_2_NC_TRACE_SILK]  61.21,127 0 bottom
JP91  JUMPER-SMT_2_NC_TRACE_SILK  [SMT-JUMPER_2_NC_TRACE_SILK]  81.53,127 180 bottom
JP92  JUMPER-SMT_2_NC_TRACE_SILK  [SMT-JUMPER_2_NC_TRACE_SILK]  61.21,123.19 180 bottom
JP93  JUMPER-SMT_3_2-NC_TRACE_SILK  [SMT-JUMPER_3_2-NC_TRACE_SILK]  97.28,119.38 180 bottom
JP94  JUMPER-SMT_2_NC_TRACE_SILK  [SMT-JUMPER_2_NC_TRACE_SILK]  87.12,127 0 bottom
JP95  JUMPER-SMT_2_NC_TRACE_SILK  [SMT-JUMPER_2_NC_TRACE_SILK]  107.44,127 180 bottom
JP96  JUMPER-SMT_2_NC_TRACE_SILK  [SMT-JUMPER_2_NC_TRACE_SILK]  87.12,123.19 180 bottom
JP97  JUMPER-SMT_3_2-NC_TRACE_SILK  [SMT-JUMPER_3_2-NC_TRACE_SILK]  123.19,119.38 180 bottom
JP98  JUMPER-SMT_2_NC_TRACE_SILK  [SMT-JUMPER_2_NC_TRACE_SILK]  113.03,127 0 bottom
JP99  JUMPER-SMT_2_NC_TRACE_SILK  [SMT-JUMPER_2_NC_TRACE_SILK]  133.35,127 180 bottom
JP100  JUMPER-SMT_2_NC_TRACE_SILK  [SMT-JUMPER_2_NC_TRACE_SILK]  113.03,123.19 180 bottom
LOGO1  OSHW-LOGOS  [OSHW-LOGO-S]  29.72,14.48 0 bottom
LOGO2  SFE_LOGO_NAME_FLAME.1_INCH  [SFE_LOGO_NAME_FLAME_.1]  19.56,26.92 0 bottom
LOGO3  QWIIC_LOGO_CONNECTOR  [QWIIC_5.5MM]  10.29,14.61 0 top
LOGO4  SFE_LOGO_NAME8_MM  [SFE_LOGO_NAME_8MM]  19.56,30.23 0 top
LOGO5  OSHW-LOGOS  [OSHW-LOGO-S]  55.63,14.48 0 bottom
LOGO6  SFE_LOGO_FLAME.1_INCH  [SFE_LOGO_FLAME_.1]  29.72,14.48 0 top
LOGO7  QWIIC_LOGO_CONNECTOR  [QWIIC_5.5MM]  36.2,14.61 0 top
LOGO8  SFE_LOGO_NAME_FLAME.1_INCH  [SFE_LOGO_NAME_FLAME_.1]  45.47,26.92 0 bottom
LOGO9  SFE_LOGO_FLAME.1_INCH  [SFE_LOGO_FLAME_.1]  55.63,14.48 0 top
LOGO10  SFE_LOGO_NAME8_MM  [SFE_LOGO_NAME_8MM]  45.47,30.23 0 top
LOGO11  OSHW-LOGOS  [OSHW-LOGO-S]  81.53,14.48 0 bottom
LOGO12  QWIIC_LOGO_CONNECTOR  [QWIIC_5.5MM]  62.1,14.61 0 top
LOGO13  SFE_LOGO_NAME_FLAME.1_INCH  [SFE_LOGO_NAME_FLAME_.1]  71.37,26.92 0 bottom
LOGO14  SFE_LOGO_FLAME.1_INCH  [SFE_LOGO_FLAME_.1]  81.53,14.48 0 top
LOGO15  SFE_LOGO_NAME8_MM  [SFE_LOGO_NAME_8MM]  71.37,30.23 0 top
LOGO16  OSHW-LOGOS  [OSHW-LOGO-S]  107.44,14.48 0 bottom
LOGO17  QWIIC_LOGO_CONNECTOR  [QWIIC_5.5MM]  88.01,14.61 0 top
LOGO18  SFE_LOGO_NAME_FLAME.1_INCH  [SFE_LOGO_NAME_FLAME_.1]  97.28,26.92 0 bottom
LOGO19  SFE_LOGO_FLAME.1_INCH  [SFE_LOGO_FLAME_.1]  107.44,14.48 0 top
LOGO20  SFE_LOGO_NAME8_MM  [SFE_LOGO_NAME_8MM]  97.28,30.23 0 top
LOGO21  OSHW-LOGOS  [OSHW-LOGO-S]  133.35,14.48 0 bottom
LOGO22  QWIIC_LOGO_CONNECTOR  [QWIIC_5.5MM]  113.92,14.61 0 top
LOGO23  SFE_LOGO_NAME_FLAME.1_INCH  [SFE_LOGO_NAME_FLAME_.1]  123.19,26.92 0 bottom
LOGO24  SFE_LOGO_FLAME.1_INCH  [SFE_LOGO_FLAME_.1]  133.35,14.48 0 top
LOGO25  SFE_LOGO_NAME8_MM  [SFE_LOGO_NAME_8MM]  123.19,30.23 0 top
LOGO26  OSHW-LOGOS  [OSHW-LOGO-S]  29.72,40.39 0 bottom
LOGO27  QWIIC_LOGO_CONNECTOR  [QWIIC_5.5MM]  10.29,40.51 0 top
LOGO28  SFE_LOGO_NAME_FLAME.1_INCH  [SFE_LOGO_NAME_FLAME_.1]  19.56,52.83 0 bottom
LOGO29  SFE_LOGO_FLAME.1_INCH  [SFE_LOGO_FLAME_.1]  29.72,40.39 0 top
LOGO30  SFE_LOGO_NAME8_MM  [SFE_LOGO_NAME_8MM]  19.56,56.13 0 top
LOGO31  OSHW-LOGOS  [OSHW-LOGO-S]  55.63,40.39 0 bottom
LOGO32  QWIIC_LOGO_CONNECTOR  [QWIIC_5.5MM]  36.2,40.51 0 top
LOGO33  SFE_LOGO_NAME_FLAME.1_INCH  [SFE_LOGO_NAME_FLAME_.1]  45.47,52.83 0 bottom
LOGO34  SFE_LOGO_FLAME.1_INCH  [SFE_LOGO_FLAME_.1]  55.63,40.39 0 top
LOGO35  SFE_LOGO_NAME8_MM  [SFE_LOGO_NAME_8MM]  45.47,56.13 0 top
LOGO36  OSHW-LOGOS  [OSHW-LOGO-S]  81.53,40.39 0 bottom
LOGO37  QWIIC_LOGO_CONNECTOR  [QWIIC_5.5MM]  62.1,40.51 0 top
LOGO38  SFE_LOGO_NAME_FLAME.1_INCH  [SFE_LOGO_NAME_FLAME_.1]  71.37,52.83 0 bottom
LOGO39  SFE_LOGO_FLAME.1_INCH  [SFE_LOGO_FLAME_.1]  81.53,40.39 0 top
LOGO40  SFE_LOGO_NAME8_MM  [SFE_LOGO_NAME_8MM]  71.37,56.13 0 top
LOGO41  OSHW-LOGOS  [OSHW-LOGO-S]  107.44,40.39 0 bottom
LOGO42  QWIIC_LOGO_CONNECTOR  [QWIIC_5.5MM]  88.01,40.51 0 top
LOGO43  SFE_LOGO_NAME_FLAME.1_INCH  [SFE_LOGO_NAME_FLAME_.1]  97.28,52.83 0 bottom
LOGO44  SFE_LOGO_FLAME.1_INCH  [SFE_LOGO_FLAME_.1]  107.44,40.39 0 top
LOGO45  SFE_LOGO_NAME8_MM  [SFE_LOGO_NAME_8MM]  97.28,56.13 0 top
LOGO46  OSHW-LOGOS  [OSHW-LOGO-S]  133.35,40.39 0 bottom
LOGO47  QWIIC_LOGO_CONNECTOR  [QWIIC_5.5MM]  113.92,40.51 0 top
LOGO48  SFE_LOGO_NAME_FLAME.1_INCH  [SFE_LOGO_NAME_FLAME_.1]  123.19,52.83 0 bottom
LOGO49  SFE_LOGO_FLAME.1_INCH  [SFE_LOGO_FLAME_.1]  133.35,40.39 0 top
LOGO50  SFE_LOGO_NAME8_MM  [SFE_LOGO_NAME_8MM]  123.19,56.13 0 top
LOGO51  OSHW-LOGOS  [OSHW-LOGO-S]  29.72,66.29 0 bottom
LOGO52  QWIIC_LOGO_CONNECTOR  [QWIIC_5.5MM]  10.29,66.42 0 top
LOGO53  SFE_LOGO_NAME_FLAME.1_INCH  [SFE_LOGO_NAME_FLAME_.1]  19.56,78.74 0 bottom
LOGO54  SFE_LOGO_FLAME.1_INCH  [SFE_LOGO_FLAME_.1]  29.72,66.29 0 top
LOGO55  SFE_LOGO_NAME8_MM  [SFE_LOGO_NAME_8MM]  19.56,82.04 0 top
LOGO56  OSHW-LOGOS  [OSHW-LOGO-S]  55.63,66.29 0 bottom
LOGO57  QWIIC_LOGO_CONNECTOR  [QWIIC_5.5MM]  36.2,66.42 0 top
LOGO58  SFE_LOGO_NAME_FLAME.1_INCH  [SFE_LOGO_NAME_FLAME_.1]  45.47,78.74 0 bottom
LOGO59  SFE_LOGO_FLAME.1_INCH  [SFE_LOGO_FLAME_.1]  55.63,66.29 0 top
LOGO60  SFE_LOGO_NAME8_MM  [SFE_LOGO_NAME_8MM]  45.47,82.04 0 top
LOGO61  OSHW-LOGOS  [OSHW-LOGO-S]  81.53,66.29 0 bottom
LOGO62  QWIIC_LOGO_CONNECTOR  [QWIIC_5.5MM]  62.1,66.42 0 top
LOGO63  SFE_LOGO_NAME_FLAME.1_INCH  [SFE_LOGO_NAME_FLAME_.1]  71.37,78.74 0 bottom
LOGO64  SFE_LOGO_FLAME.1_INCH  [SFE_LOGO_FLAME_.1]  81.53,66.29 0 top
LOGO65  SFE_LOGO_NAME8_MM  [SFE_LOGO_NAME_8MM]  71.37,82.04 0 top
LOGO66  OSHW-LOGOS  [OSHW-LOGO-S]  107.44,66.29 0 bottom
LOGO67  QWIIC_LOGO_CONNECTOR  [QWIIC_5.5MM]  88.01,66.42 0 top
LOGO68  SFE_LOGO_NAME_FLAME.1_INCH  [SFE_LOGO_NAME_FLAME_.1]  97.28,78.74 0 bottom
LOGO69  SFE_LOGO_FLAME.1_INCH  [SFE_LOGO_FLAME_.1]  107.44,66.29 0 top
LOGO70  SFE_LOGO_NAME8_MM  [SFE_LOGO_NAME_8MM]  97.28,82.04 0 top
LOGO71  OSHW-LOGOS  [OSHW-LOGO-S]  133.35,66.29 0 bottom
LOGO72  QWIIC_LOGO_CONNECTOR  [QWIIC_5.5MM]  113.92,66.42 0 top
LOGO73  SFE_LOGO_NAME_FLAME.1_INCH  [SFE_LOGO_NAME_FLAME_.1]  123.19,78.74 0 bottom
LOGO74  SFE_LOGO_FLAME.1_INCH  [SFE_LOGO_FLAME_.1]  133.35,66.29 0 top
LOGO75  SFE_LOGO_NAME8_MM  [SFE_LOGO_NAME_8MM]  123.19,82.04 0 top
LOGO76  OSHW-LOGOS  [OSHW-LOGO-S]  29.72,92.2 0 bottom
LOGO77  QWIIC_LOGO_CONNECTOR  [QWIIC_5.5MM]  10.29,92.33 0 top
LOGO78  SFE_LOGO_NAME_FLAME.1_INCH  [SFE_LOGO_NAME_FLAME_.1]  19.56,104.65 0 bottom
LOGO79  SFE_LOGO_FLAME.1_INCH  [SFE_LOGO_FLAME_.1]  29.72,92.2 0 top
LOGO80  SFE_LOGO_NAME8_MM  [SFE_LOGO_NAME_8MM]  19.56,107.95 0 top
LOGO81  OSHW-LOGOS  [OSHW-LOGO-S]  55.63,92.2 0 bottom
LOGO82  QWIIC_LOGO_CONNECTOR  [QWIIC_5.5MM]  36.2,92.33 0 top
LOGO83  SFE_LOGO_NAME_FLAME.1_INCH  [SFE_LOGO_NAME_FLAME_.1]  45.47,104.65 0 bottom
LOGO84  SFE_LOGO_FLAME.1_INCH  [SFE_LOGO_FLAME_.1]  55.63,92.2 0 top
LOGO85  SFE_LOGO_NAME8_MM  [SFE_LOGO_NAME_8MM]  45.47,107.95 0 top
LOGO86  OSHW-LOGOS  [OSHW-LOGO-S]  81.53,92.2 0 bottom
LOGO87  QWIIC_LOGO_CONNECTOR  [QWIIC_5.5MM]  62.1,92.33 0 top
LOGO88  SFE_LOGO_NAME_FLAME.1_INCH  [SFE_LOGO_NAME_FLAME_.1]  71.37,104.65 0 bottom
LOGO89  SFE_LOGO_FLAME.1_INCH  [SFE_LOGO_FLAME_.1]  81.53,92.2 0 top
LOGO90  SFE_LOGO_NAME8_MM  [SFE_LOGO_NAME_8MM]  71.37,107.95 0 top
LOGO91  OSHW-LOGOS  [OSHW-LOGO-S]  107.44,92.2 0 bottom
LOGO92  QWIIC_LOGO_CONNECTOR  [QWIIC_5.5MM]  88.01,92.33 0 top
LOGO93  SFE_LOGO_NAME_FLAME.1_INCH  [SFE_LOGO_NAME_FLAME_.1]  97.28,104.65 0 bottom
LOGO94  SFE_LOGO_FLAME.1_INCH  [SFE_LOGO_FLAME_.1]  107.44,92.2 0 top
LOGO95  SFE_LOGO_NAME8_MM  [SFE_LOGO_NAME_8MM]  97.28,107.95 0 top
LOGO96  OSHW-LOGOS  [OSHW-LOGO-S]  133.35,92.2 0 bottom
LOGO97  QWIIC_LOGO_CONNECTOR  [QWIIC_5.5MM]  113.92,92.33 0 top
LOGO98  SFE_LOGO_NAME_FLAME.1_INCH  [SFE_LOGO_NAME_FLAME_.1]  123.19,104.65 0 bottom
LOGO99  SFE_LOGO_FLAME.1_INCH  [SFE_LOGO_FLAME_.1]  133.35,92.2 0 top
LOGO100  SFE_LOGO_NAME8_MM  [SFE_LOGO_NAME_8MM]  123.19,107.95 0 top
LOGO101  OSHW-LOGOS  [OSHW-LOGO-S]  29.72,118.11 0 bottom
LOGO102  QWIIC_LOGO_CONNECTOR  [QWIIC_5.5MM]  10.29,118.24 0 top
LOGO103  SFE_LOGO_NAME_FLAME.1_INCH  [SFE_LOGO_NAME_FLAME_.1]  19.56,130.56 0 bottom
LOGO104  SFE_LOGO_FLAME.1_INCH  [SFE_LOGO_FLAME_.1]  29.72,118.11 0 top
LOGO105  SFE_LOGO_NAME8_MM  [SFE_LOGO_NAME_8MM]  19.56,133.86 0 top
LOGO106  OSHW-LOGOS  [OSHW-LOGO-S]  55.63,118.11 0 bottom
LOGO107  QWIIC_LOGO_CONNECTOR  [QWIIC_5.5MM]  36.2,118.24 0 top
LOGO108  SFE_LOGO_NAME_FLAME.1_INCH  [SFE_LOGO_NAME_FLAME_.1]  45.47,130.56 0 bottom
LOGO109  SFE_LOGO_FLAME.1_INCH  [SFE_LOGO_FLAME_.1]  55.63,118.11 0 top
LOGO110  SFE_LOGO_NAME8_MM  [SFE_LOGO_NAME_8MM]  45.47,133.86 0 top
LOGO111  OSHW-LOGOS  [OSHW-LOGO-S]  81.53,118.11 0 bottom
LOGO112  QWIIC_LOGO_CONNECTOR  [QWIIC_5.5MM]  62.1,118.24 0 top
LOGO113  SFE_LOGO_NAME_FLAME.1_INCH  [SFE_LOGO_NAME_FLAME_.1]  71.37,130.56 0 bottom
LOGO114  SFE_LOGO_FLAME.1_INCH  [SFE_LOGO_FLAME_.1]  81.53,118.11 0 top
LOGO115  SFE_LOGO_NAME8_MM  [SFE_LOGO_NAME_8MM]  71.37,133.86 0 top
LOGO116  OSHW-LOGOS  [OSHW-LOGO-S]  107.44,118.11 0 bottom
LOGO117  QWIIC_LOGO_CONNECTOR  [QWIIC_5.5MM]  88.01,118.24 0 top
LOGO118  SFE_LOGO_NAME_FLAME.1_INCH  [SFE_LOGO_NAME_FLAME_.1]  97.28,130.56 0 bottom
LOGO119  SFE_LOGO_FLAME.1_INCH  [SFE_LOGO_FLAME_.1]  107.44,118.11 0 top
LOGO120  SFE_LOGO_NAME8_MM  [SFE_LOGO_NAME_8MM]  97.28,133.86 0 top
LOGO121  OSHW-LOGOS  [OSHW-LOGO-S]  133.35,118.11 0 bottom
LOGO122  QWIIC_LOGO_CONNECTOR  [QWIIC_5.5MM]  113.92,118.24 0 top
LOGO123  SFE_LOGO_NAME_FLAME.1_INCH  [SFE_LOGO_NAME_FLAME_.1]  123.19,130.56 0 bottom
LOGO124  SFE_LOGO_FLAME.1_INCH  [SFE_LOGO_FLAME_.1]  133.35,118.11 0 top
LOGO125  SFE_LOGO_NAME8_MM  [SFE_LOGO_NAME_8MM]  123.19,133.86 0 top
R1  2.2k  [0603]  22.1,14.48 180 top
R2  2.2k  [0603]  17.02,14.48 0 top
R3  1k  [0603]  14.48,19.56 270 top
R4  10k  [0603]  24.64,23.37 0 top
R5  10k  [0603]  19.56,23.37 180 top
R6  2.2k  [0603]  48.01,14.48 180 top
R7  2.2k  [0603]  42.93,14.48 0 top
R8  1k  [0603]  40.39,19.56 270 top
R9  10k  [0603]  50.55,23.37 0 top
R10  10k  [0603]  45.47,23.37 180 top
R11  2.2k  [0603]  73.91,14.48 180 top
R12  2.2k  [0603]  68.83,14.48 0 top
R13  1k  [0603]  66.29,19.56 270 top
R14  10k  [0603]  76.45,23.37 0 top
R15  10k  [0603]  71.37,23.37 180 top
R16  2.2k  [0603]  99.82,14.48 180 top
R17  2.2k  [0603]  94.74,14.48 0 top
R18  1k  [0603]  92.2,19.56 270 top
R19  10k  [0603]  102.36,23.37 0 top
R20  10k  [0603]  97.28,23.37 180 top
R21  2.2k  [0603]  125.73,14.48 180 top
R22  2.2k  [0603]  120.65,14.48 0 top
R23  1k  [0603]  118.11,19.56 270 top
R24  10k  [0603]  128.27,23.37 0 top
R25  10k  [0603]  123.19,23.37 180 top
R26  2.2k  [0603]  22.1,40.39 180 top
R27  2.2k  [0603]  17.02,40.39 0 top
R28  1k  [0603]  14.48,45.47 270 top
R29  10k  [0603]  24.64,49.28 0 top
R30  10k  [0603]  19.56,49.28 180 top
R31  2.2k  [0603]  48.01,40.39 180 top
R32  2.2k  [0603]  42.93,40.39 0 top
R33  1k  [0603]  40.39,45.47 270 top
R34  10k  [0603]  50.55,49.28 0 top
R35  10k  [0603]  45.47,49.28 180 top
R36  2.2k  [0603]  73.91,40.39 180 top
R37  2.2k  [0603]  68.83,40.39 0 top
R38  1k  [0603]  66.29,45.47 270 top
R39  10k  [0603]  76.45,49.28 0 top
R40  10k  [0603]  71.37,49.28 180 top
R41  2.2k  [0603]  99.82,40.39 180 top
R42  2.2k  [0603]  94.74,40.39 0 top
R43  1k  [0603]  92.2,45.47 270 top
R44  10k  [0603]  102.36,49.28 0 top
R45  10k  [0603]  97.28,49.28 180 top
R46  2.2k  [0603]  125.73,40.39 180 top
R47  2.2k  [0603]  120.65,40.39 0 top
R48  1k  [0603]  118.11,45.47 270 top
R49  10k  [0603]  128.27,49.28 0 top
R50  10k  [0603]  123.19,49.28 180 top
R51  2.2k  [0603]  22.1,66.29 180 top
R52  2.2k  [0603]  17.02,66.29 0 top
R53  1k  [0603]  14.48,71.37 270 top
R54  10k  [0603]  24.64,75.18 0 top
R55  10k  [0603]  19.56,75.18 180 top
R56  2.2k  [0603]  48.01,66.29 180 top
R57  2.2k  [0603]  42.93,66.29 0 top
R58  1k  [0603]  40.39,71.37 270 top
R59  10k  [0603]  50.55,75.18 0 top
R60  10k  [0603]  45.47,75.18 180 top
R61  2.2k  [0603]  73.91,66.29 180 top
R62  2.2k  [0603]  68.83,66.29 0 top
R63  1k  [0603]  66.29,71.37 270 top
R64  10k  [0603]  76.45,75.18 0 top
R65  10k  [0603]  71.37,75.18 180 top
R66  2.2k  [0603]  99.82,66.29 180 top
R67  2.2k  [0603]  94.74,66.29 0 top
R68  1k  [0603]  92.2,71.37 270 top
R69  10k  [0603]  102.36,75.18 0 top
R70  10k  [0603]  97.28,75.18 180 top
R71  2.2k  [0603]  125.73,66.29 180 top
R72  2.2k  [0603]  120.65,66.29 0 top
R73  1k  [0603]  118.11,71.37 270 top
R74  10k  [0603]  128.27,75.18 0 top
R75  10k  [0603]  123.19,75.18 180 top
R76  2.2k  [0603]  22.1,92.2 180 top
R77  2.2k  [0603]  17.02,92.2 0 top
R78  1k  [0603]  14.48,97.28 270 top
R79  10k  [0603]  24.64,101.09 0 top
R80  10k  [0603]  19.56,101.09 180 top
R81  2.2k  [0603]  48.01,92.2 180 top
R82  2.2k  [0603]  42.93,92.2 0 top
R83  1k  [0603]  40.39,97.28 270 top
R84  10k  [0603]  50.55,101.09 0 top
R85  10k  [0603]  45.47,101.09 180 top
R86  2.2k  [0603]  73.91,92.2 180 top
R87  2.2k  [0603]  68.83,92.2 0 top
R88  1k  [0603]  66.29,97.28 270 top
R89  10k  [0603]  76.45,101.09 0 top
R90  10k  [0603]  71.37,101.09 180 top
R91  2.2k  [0603]  99.82,92.2 180 top
R92  2.2k  [0603]  94.74,92.2 0 top
R93  1k  [0603]  92.2,97.28 270 top
R94  10k  [0603]  102.36,101.09 0 top
R95  10k  [0603]  97.28,101.09 180 top
R96  2.2k  [0603]  125.73,92.2 180 top
R97  2.2k  [0603]  120.65,92.2 0 top
R98  1k  [0603]  118.11,97.28 270 top
R99  10k  [0603]  128.27,101.09 0 top
R100  10k  [0603]  123.19,101.09 180 top
R101  2.2k  [0603]  22.1,118.11 180 top
R102  2.2k  [0603]  17.02,118.11 0 top
R103  1k  [0603]  14.48,123.19 270 top
R104  10k  [0603]  24.64,127 0 top
R105  10k  [0603]  19.56,127 180 top
R106  2.2k  [0603]  48.01,118.11 180 top
R107  2.2k  [0603]  42.93,118.11 0 top
R108  1k  [0603]  40.39,123.19 270 top
R109  10k  [0603]  50.55,127 0 top
R110  10k  [0603]  45.47,127 180 top
R111  2.2k  [0603]  73.91,118.11 180 top
R112  2.2k  [0603]  68.83,118.11 0 top
R113  1k  [0603]  66.29,123.19 270 top
R114  10k  [0603]  76.45,127 0 top
R115  10k  [0603]  71.37,127 180 top
R116  2.2k  [0603]  99.82,118.11 180 top
R117  2.2k  [0603]  94.74,118.11 0 top
R118  1k  [0603]  92.2,123.19 270 top
R119  10k  [0603]  102.36,127 0 top
R120  10k  [0603]  97.28,127 180 top
R121  2.2k  [0603]  125.73,118.11 180 top
R122  2.2k  [0603]  120.65,118.11 0 top
R123  1k  [0603]  118.11,123.19 270 top
R124  10k  [0603]  128.27,127 0 top
R125  10k  [0603]  123.19,127 180 top
U1  STHS34PF80  [OLGA-10L]  45.47,19.56 0 top
U2  STHS34PF80  [OLGA-10L]  19.56,19.56 0 top
U3  STHS34PF80  [OLGA-10L]  71.37,19.56 0 top
U4  STHS34PF80  [OLGA-10L]  97.28,19.56 0 top
U5  STHS34PF80  [OLGA-10L]  123.19,19.56 0 top
U6  STHS34PF80  [OLGA-10L]  19.56,45.47 0 top
U7  STHS34PF80  [OLGA-10L]  45.47,45.47 0 top
U8  STHS34PF80  [OLGA-10L]  71.37,45.47 0 top
U9  STHS34PF80  [OLGA-10L]  97.28,45.47 0 top
U10  STHS34PF80  [OLGA-10L]  123.19,45.47 0 top
U11  STHS34PF80  [OLGA-10L]  19.56,71.37 0 top
U12  STHS34PF80  [OLGA-10L]  45.47,71.37 0 top
U13  STHS34PF80  [OLGA-10L]  71.37,71.37 0 top
U14  STHS34PF80  [OLGA-10L]  97.28,71.37 0 top
U15  STHS34PF80  [OLGA-10L]  123.19,71.37 0 top
U16  STHS34PF80  [OLGA-10L]  19.56,97.28 0 top
U17  STHS34PF80  [OLGA-10L]  45.47,97.28 0 top
U18  STHS34PF80  [OLGA-10L]  71.37,97.28 0 top
U19  STHS34PF80  [OLGA-10L]  97.28,97.28 0 top
U20  STHS34PF80  [OLGA-10L]  123.19,97.28 0 top
U21  STHS34PF80  [OLGA-10L]  19.56,123.19 0 top
U22  STHS34PF80  [OLGA-10L]  45.47,123.19 0 top
U23  STHS34PF80  [OLGA-10L]  71.37,123.19 0 top
U24  STHS34PF80  [OLGA-10L]  97.28,123.19 0 top
U25  STHS34PF80  [OLGA-10L]  123.19,123.19 0 top
U$1  [#I�C#0]  24.51,15.75 0 bottom
U$2  [##CS##0]  23.37,8.64 90 bottom
U$3  [#3V3#0]  15.75,8.64 90 bottom
U$4  [#INT#1]  25.91,8.64 90 bottom
U$5  [STHS34PF800]  19.56,25.02 0 top
U$6  [STHS34PF800]  19.56,20.83 0 bottom
U$7  [PRESENCE0]  19.56,28.45 0 top
U$8  [PRESENCE0]  19.56,24.64 0 bottom
U$9  [PWR11]  9.4,26.54 0 top
U$10  [##INT##0]  28.83,23.37 0 bottom
U$11  [#SDA#0]  18.29,13.08 270 top
U$12  [SENSOR1]  19.56,26.8 0 top
U$13  [##CS##1]  23.37,11.94 270 top
U$14  [SENSOR1]  19.56,22.86 0 bottom
U$15  [#INT#2]  25.91,12.57 270 top
U$16  [#GND#4]  13.21,13.08 270 top
U$17  [#LED#10]  10.29,23.37 0 bottom
U$18  [#GND#4]  13.21,8.64 90 bottom
U$19  [#3V3#0]  15.75,12.95 270 top
U$20  [#SDA#5]  18.29,8.64 90 bottom
U$21  [#SCL#6]  20.83,8.64 90 bottom
U$22  [#SCL#0]  20.83,12.83 270 top
U$23  [##CS#0]  13.59,19.56 0 bottom
U$24  [PWR11]  35.31,26.54 0 top
U$25  [#LED#10]  36.2,23.37 0 bottom
U$26  [#GND#4]  39.12,8.64 90 bottom
U$27  [#SDA#5]  44.2,8.64 90 bottom
U$28  [#SCL#6]  46.74,8.64 90 bottom
U$29  [#3V3#0]  41.66,8.64 90 bottom
U$30  [##CS##0]  49.28,8.64 90 bottom
U$31  [#INT#1]  51.82,8.64 90 bottom
U$32  [STHS34PF800]  45.47,25.02 0 top
U$33  [STHS34PF800]  45.47,20.83 0 bottom
U$34  [PRESENCE0]  45.47,28.45 0 top
U$35  [PRESENCE0]  45.47,24.64 0 bottom
U$36  [SENSOR1]  45.47,26.8 0 top
U$37  [SENSOR1]  45.47,22.86 0 bottom
U$38  [#I�C#0]  50.42,15.75 0 bottom
U$39  [#GND#4]  39.12,13.08 270 top
U$40  [#3V3#0]  41.66,12.95 270 top
U$41  [##INT##0]  54.74,23.37 0 bottom
U$42  [#SDA#0]  44.2,13.08 270 top
U$43  [##CS##1]  49.28,11.94 270 top
U$44  [#INT#2]  51.82,12.57 270 top
U$45  [#SCL#0]  46.74,12.83 270 top
U$46  [##CS#0]  39.5,19.56 0 bottom
U$47  [PWR11]  61.21,26.54 0 top
U$48  [#LED#10]  62.1,23.37 0 bottom
U$49  [#GND#4]  65.02,8.64 90 bottom
U$50  [#SDA#5]  70.1,8.64 90 bottom
U$51  [#SCL#6]  72.64,8.64 90 bottom
U$52  [#3V3#0]  67.56,8.64 90 bottom
U$53  [##CS##0]  75.18,8.64 90 bottom
U$54  [#INT#1]  77.72,8.64 90 bottom
U$55  [STHS34PF800]  71.37,25.02 0 top
U$56  [STHS34PF800]  71.37,20.83 0 bottom
U$57  [PRESENCE0]  71.37,28.45 0 top
U$58  [PRESENCE0]  71.37,24.64 0 bottom
U$59  [SENSOR1]  71.37,26.8 0 top
U$60  [SENSOR1]  71.37,22.86 0 bottom
U$61  [#I�C#0]  76.33,15.75 0 bottom
U$62  [#GND#4]  65.02,13.08 270 top
U$63  [#3V3#0]  67.56,12.95 270 top
U$64  [##INT##0]  80.65,23.37 0 bottom
U$65  [#SDA#0]  70.1,13.08 270 top
U$66  [##CS##1]  75.18,11.94 270 top
U$67  [#INT#2]  77.72,12.57 270 top
U$68  [#SCL#0]  72.64,12.83 270 top
U$69  [##CS#0]  65.41,19.56 0 bottom
U$70  [PWR11]  87.12,26.54 0 top
U$71  [#LED#10]  88.01,23.37 0 bottom
U$72  [#GND#4]  90.93,8.64 90 bottom
U$73  [#SDA#5]  96.01,8.64 90 bottom
U$74  [#SCL#6]  98.55,8.64 90 bottom
U$75  [#3V3#0]  93.47,8.64 90 bottom
U$76  [##CS##0]  101.09,8.64 90 bottom
U$77  [#INT#1]  103.63,8.64 90 bottom
U$78  [STHS34PF800]  97.28,25.02 0 top
U$79  [STHS34PF800]  97.28,20.83 0 bottom
U$80  [PRESENCE0]  97.28,28.45 0 top
U$81  [PRESENCE0]  97.28,24.64 0 bottom
U$82  [SENSOR1]  97.28,26.8 0 top
U$83  [SENSOR1]  97.28,22.86 0 bottom
U$84  [#I�C#0]  102.23,15.75 0 bottom
U$85  [#GND#4]  90.93,13.08 270 top
U$86  [#3V3#0]  93.47,12.95 270 top
U$87  [##INT##0]  106.55,23.37 0 bottom
U$88  [#SDA#0]  96.01,13.08 270 top
U$89  [##CS##1]  101.09,11.94 270 top
U$90  [#INT#2]  103.63,12.57 270 top
U$91  [#SCL#0]  98.55,12.83 270 top
U$92  [##CS#0]  91.31,19.56 0 bottom
U$93  [PWR11]  113.03,26.54 0 top
U$94  [#LED#10]  113.92,23.37 0 bottom
U$95  [#GND#4]  116.84,8.64 90 bottom
U$96  [#SDA#5]  121.92,8.64 90 bottom
U$97  [#SCL#6]  124.46,8.64 90 bottom
U$98  [#3V3#0]  119.38,8.64 90 bottom
U$99  [##CS##0]  127,8.64 90 bottom
U$100  [#INT#1]  129.54,8.64 90 bottom
U$101  [STHS34PF800]  123.19,25.02 0 top
U$102  [STHS34PF800]  123.19,20.83 0 bottom
U$103  [PRESENCE0]  123.19,28.45 0 top
U$104  [PRESENCE0]  123.19,24.64 0 bottom
U$105  [SENSOR1]  123.19,26.8 0 top
U$106  [SENSOR1]  123.19,22.86 0 bottom
U$107  [#I�C#0]  128.14,15.75 0 bottom
U$108  [#GND#4]  116.84,13.08 270 top
U$109  [#3V3#0]  119.38,12.95 270 top
U$110  [##INT##0]  132.46,23.37 0 bottom
U$111  [#SDA#0]  121.92,13.08 270 top
U$112  [##CS##1]  127,11.94 270 top
U$113  [#INT#2]  129.54,12.57 270 top
U$114  [#SCL#0]  124.46,12.83 270 top
U$115  [##CS#0]  117.22,19.56 0 bottom
U$116  [PWR11]  9.4,52.45 0 top
U$117  [#LED#10]  10.29,49.28 0 bottom
U$118  [#GND#4]  13.21,34.54 90 bottom
U$119  [#SDA#5]  18.29,34.54 90 bottom
U$120  [#SCL#6]  20.83,34.54 90 bottom
U$121  [#3V3#0]  15.75,34.54 90 bottom
U$122  [##CS##0]  23.37,34.54 90 bottom
U$123  [#INT#1]  25.91,34.54 90 bottom
U$124  [STHS34PF800]  19.56,50.93 0 top
U$125  [STHS34PF800]  19.56,46.74 0 bottom
U$126  [PRESENCE0]  19.56,54.36 0 top
U$127  [PRESENCE0]  19.56,50.55 0 bottom
U$128  [SENSOR1]  19.56,52.7 0 top
U$129  [SENSOR1]  19.56,48.77 0 bottom
U$130  [#I�C#0]  24.51,41.66 0 bottom
U$131  [#GND#4]  13.21,38.99 270 top
U$132  [#3V3#0]  15.75,38.86 270 top
U$133  [##INT##0]  28.83,49.28 0 bottom
U$134  [#SDA#0]  18.29,38.99 270 top
U$135  [##CS##1]  23.37,37.85 270 top
U$136  [#INT#2]  25.91,38.48 270 top
U$137  [#SCL#0]  20.83,38.73 270 top
U$138  [##CS#0]  13.59,45.47 0 bottom
U$139  [PWR11]  35.31,52.45 0 top
U$140  [#LED#10]  36.2,49.28 0 bottom
U$141  [#GND#4]  39.12,34.54 90 bottom
U$142  [#SDA#5]  44.2,34.54 90 bottom
U$143  [#SCL#6]  46.74,34.54 90 bottom
U$144  [#3V3#0]  41.66,34.54 90 bottom
U$145  [##CS##0]  49.28,34.54 90 bottom
U$146  [#INT#1]  51.82,34.54 90 bottom
U$147  [STHS34PF800]  45.47,50.93 0 top
U$148  [STHS34PF800]  45.47,46.74 0 bottom
U$149  [PRESENCE0]  45.47,54.36 0 top
U$150  [PRESENCE0]  45.47,50.55 0 bottom
U$151  [SENSOR1]  45.47,52.7 0 top
U$152  [SENSOR1]  45.47,48.77 0 bottom
U$153  [#I�C#0]  50.42,41.66 0 bottom
U$154  [#GND#4]  39.12,38.99 270 top
U$155  [#3V3#0]  41.66,38.86 270 top
U$156  [##INT##0]  54.74,49.28 0 bottom
U$157  [#SDA#0]  44.2,38.99 270 top
U$158  [##CS##1]  49.28,37.85 270 top
U$159  [#INT#2]  51.82,38.48 270 top
U$160  [#SCL#0]  46.74,38.73 270 top
U$161  [##CS#0]  39.5,45.47 0 bottom
U$162  [PWR11]  61.21,52.45 0 top
U$163  [#LED#10]  62.1,49.28 0 bottom
U$164  [#GND#4]  65.02,34.54 90 bottom
U$165  [#SDA#5]  70.1,34.54 90 bottom
U$166  [#SCL#6]  72.64,34.54 90 bottom
U$167  [#3V3#0]  67.56,34.54 90 bottom
U$168  [##CS##0]  75.18,34.54 90 bottom
U$169  [#INT#1]  77.72,34.54 90 bottom
U$170  [STHS34PF800]  71.37,50.93 0 top
U$171  [STHS34PF800]  71.37,46.74 0 bottom
U$172  [PRESENCE0]  71.37,54.36 0 top
U$173  [PRESENCE0]  71.37,50.55 0 bottom
U$174  [SENSOR1]  71.37,52.7 0 top
U$175  [SENSOR1]  71.37,48.77 0 bottom
U$176  [#I�C#0]  76.33,41.66 0 bottom
U$177  [#GND#4]  65.02,38.99 270 top
U$178  [#3V3#0]  67.56,38.86 270 top
U$179  [##INT##0]  80.65,49.28 0 bottom
U$180  [#SDA#0]  70.1,38.99 270 top
U$181  [##CS##1]  75.18,37.85 270 top
U$182  [#INT#2]  77.72,38.48 270 top
U$183  [#SCL#0]  72.64,38.73 270 top
U$184  [##CS#0]  65.41,45.47 0 bottom
U$185  [PWR11]  87.12,52.45 0 top
U$186  [#LED#10]  88.01,49.28 0 bottom
U$187  [#GND#4]  90.93,34.54 90 bottom
U$188  [#SDA#5]  96.01,34.54 90 bottom
U$189  [#SCL#6]  98.55,34.54 90 bottom
U$190  [#3V3#0]  93.47,34.54 90 bottom
U$191  [##CS##0]  101.09,34.54 90 bottom
U$192  [#INT#1]  103.63,34.54 90 bottom
U$193  [STHS34PF800]  97.28,50.93 0 top
U$194  [STHS34PF800]  97.28,46.74 0 bottom
U$195  [PRESENCE0]  97.28,54.36 0 top
U$196  [PRESENCE0]  97.28,50.55 0 bottom
U$197  [SENSOR1]  97.28,52.7 0 top
U$198  [SENSOR1]  97.28,48.77 0 bottom
U$199  [#I�C#0]  102.23,41.66 0 bottom
U$200  [#GND#4]  90.93,38.99 270 top
U$201  [#3V3#0]  93.47,38.86 270 top
U$202  [##INT##0]  106.55,49.28 0 bottom
U$203  [#SDA#0]  96.01,38.99 270 top
U$204  [##CS##1]  101.09,37.85 270 top
U$205  [#INT#2]  103.63,38.48 270 top
U$206  [#SCL#0]  98.55,38.73 270 top
U$207  [##CS#0]  91.31,45.47 0 bottom
U$208  [PWR11]  113.03,52.45 0 top
U$209  [#LED#10]  113.92,49.28 0 bottom
U$210  [#GND#4]  116.84,34.54 90 bottom
U$211  [#SDA#5]  121.92,34.54 90 bottom
U$212  [#SCL#6]  124.46,34.54 90 bottom
U$213  [#3V3#0]  119.38,34.54 90 bottom
U$214  [##CS##0]  127,34.54 90 bottom
U$215  [#INT#1]  129.54,34.54 90 bottom
U$216  [STHS34PF800]  123.19,50.93 0 top
U$217  [STHS34PF800]  123.19,46.74 0 bottom
U$218  [PRESENCE0]  123.19,54.36 0 top
U$219  [PRESENCE0]  123.19,50.55 0 bottom
U$220  [SENSOR1]  123.19,52.7 0 top